# Allegro board CY8CKIT-050B_Board_Layout.brd
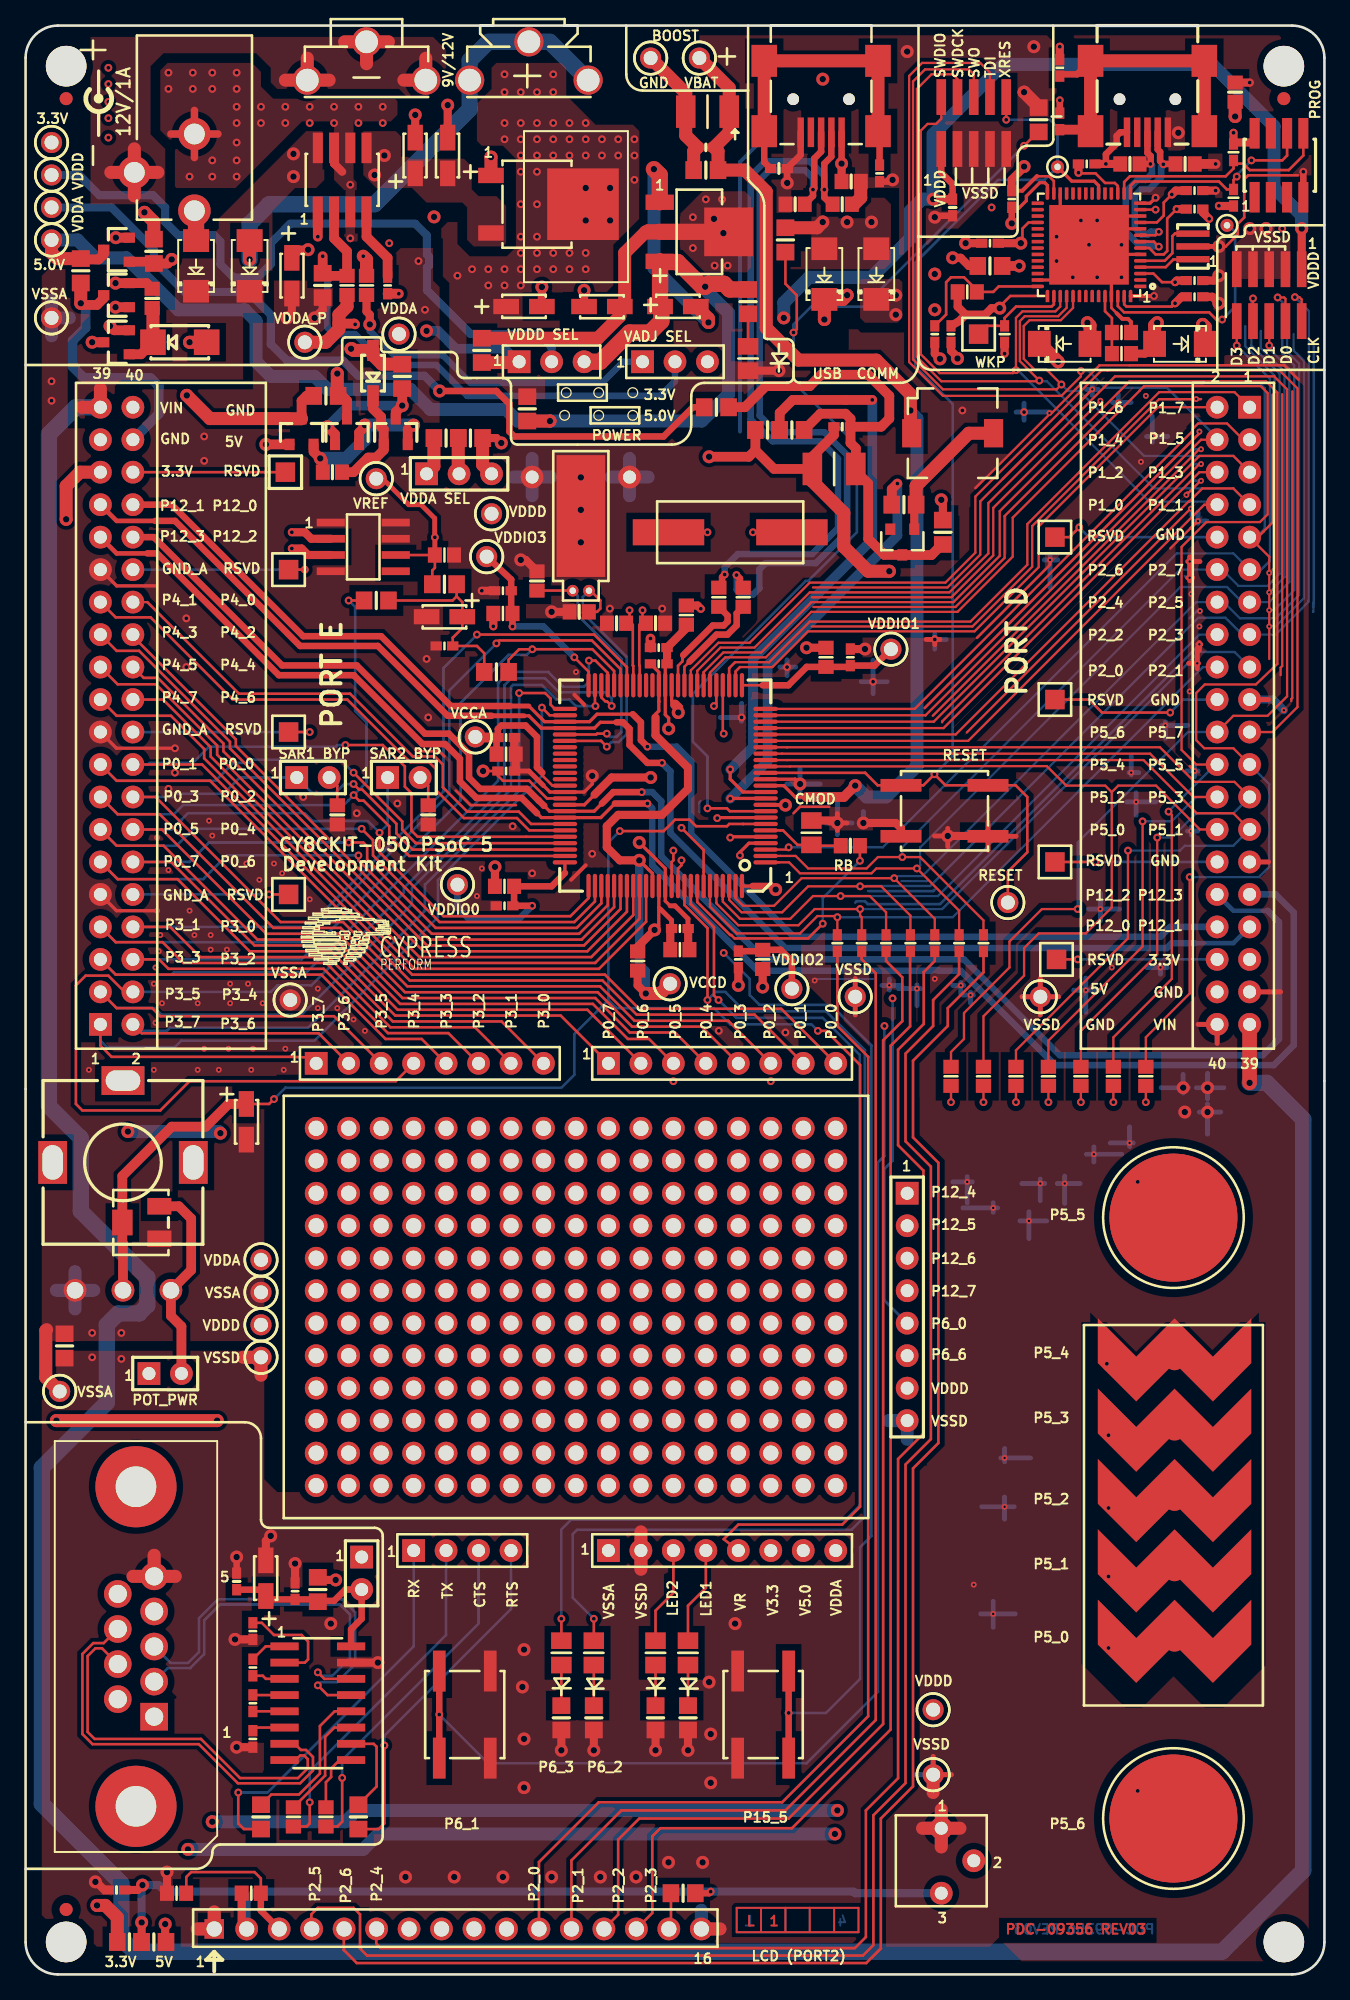
[diagram p0: board, top side]
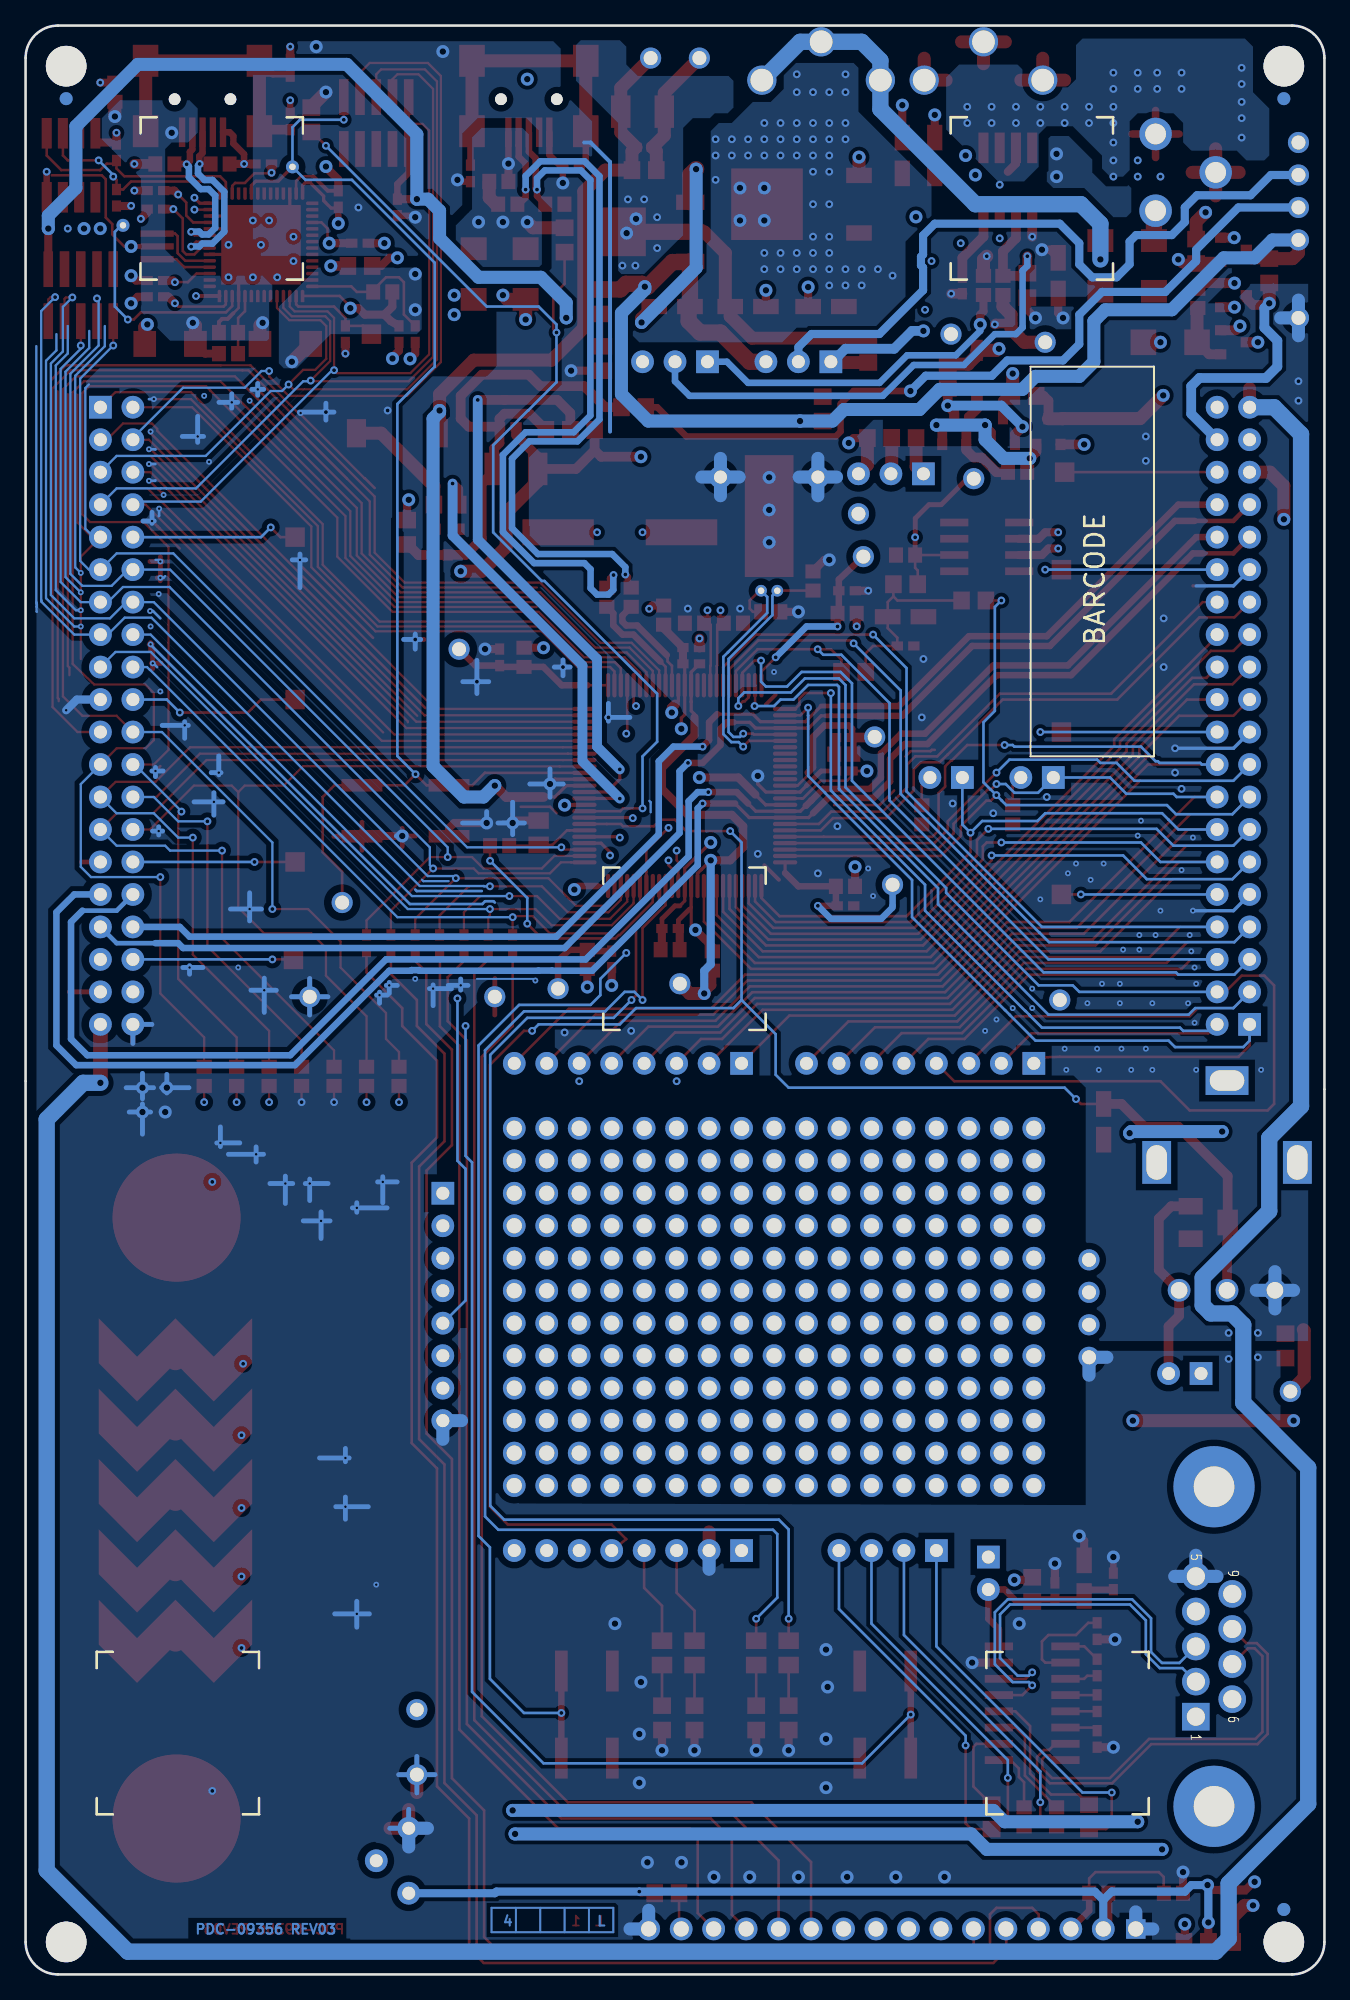
[diagram p1: board, bottom side, seen from below]

Outline 101.6 x 152.4 mm; copper layers: TOP, L02_PWR, L03_GND, BOTTOM. Coordinates in mm from the lower left corner of the outline.

## Design rules (mm)
net group CAPSENSE: nets N21185654 N21185709 N21185711 N21185727 N21185729 N21185731 N21185741 P1[2] P1[5] P1[6] P1[7] P2[0] P2[1] P2[2] P2[3] P2[4] P2[5] P2[6] P2[7] P5[0] P5[1] P5[2] P5[3] P5[4] P5[5] P5[6] P5[7] SWDCK SWDIO SWO TDI
net group DIFF-90: nets D+ D- DM DM_P DP DP_P
net group GND_SP: nets GND_EARTH
net group PWR_PH: nets N14773122 N16777347 N19970100 P12[0] P12[1] P12[2] P12[3] P12[4] P12[5] P12[6] P12[7] SEL3V3 V5.0 VBAT VBUS2 VCCD VDDA VDDD VIN VLCD
net group PWR_SP: nets N16777310 N16777432 V3.3
net group SPACE_15MILS: nets P0[0] P0[1] P0[2] P0[3] P0[4] P0[5] P0[6] P0[7] P3[0] P3[1] P3[2] P3[3] P3[4] P3[5] P3[6] P3[7] P4[0] P4[1] P4[2] P4[3] P4[4] P4[5] P4[6] P4[7]
net group SPACING_15MILS: nets N15034817 N15034825 N19309695 N19312684 N19313685 N19315692 N19318568 P6[6] P15[4]

## Placement (name value [footprint] x y rotation side)
BH1  BAT 9V MALE  [BATTHLDR_M9V]  26.67 151.13 180 top
BH2  BAT 9V FEMALE  [BATTHLDR_F9V]  39.37 151.13 180 top
C1  0.1 uFd  [C-CC0402]  72.52 138.18 270 top
C2  10 uFd 16v  [C-PCC3216]  51.03 130.43 0 top
C3  0.1 uFd  [C-CC0402]  53.21 142.88 180 top
C4  10 uFd 16v  [C-PCC3216]  30.48 142.24 90 top
C5  10 uFd 16v  [C-PCC3216]  33.02 142.24 90 top
C6  22 uFd  [C-CC1210]  53.34 145.67 180 top
C7  0.1 uFd  [C-CC0402]  77.14 138.84 270 top
C8  0.01 uFd  [C-CC0402]  80.9 149.1 90 top
C9  0.01 uFd  [C-CC0402]  66.8 140.84 270 top
C10  0.1 uFd  [C-CC0402]  91.44 139.5 0 top
C11  2.2 uFd  [C-CC0402]  91.44 138.05 0 top
C12  0.1 uFd  [C-CC0402]  75.44 135.38 180 top
C13  10 uFd 16v  [C-PCC3216]  20.83 132.84 270 top
C14  10 uFd 16v  [C-PCC3216]  38.99 130.43 0 top
C15  10 uFd 16v  [C-PCC3216]  45.08 130.43 180 top
C16  0.1 uFd  [C-CC0402]  91.44 132.46 0 top
C17  0.1 uFd  [C-CC0402]  28.32 132.08 270 top
C18  0.1 uFd  [C-CC0402]  91.44 131.19 0 top
C19  0.1 uFd  [C-CC0402]  71.12 128.27 270 top
C20  0.1 uFd  [C-CC0402]  72.39 128.27 270 top
C21  0.1 uFd  [C-CC0402]  83.01 141.58 0 top
C22  22 uFd  [C-CC1210]  63.25 117.73 180 top
C23  0.1 uFd  [C-CC0402]  63.88 121.03 180 top
C24  1.0 uFd  [C-CC0603]  32.77 111 0 top
C25  22 pFd  [C-CC0603]  40 108.97 90 top
C26  0.1 uFd  [C-CC0402]  37.34 108.2 180 top
C27  22 pFd  [C-CC0603]  43.31 106.55 180 top
C28  10 uFd 16v  [C-PCC3216]  32.77 106.17 180 top
C29  1.0 uFd  [C-CC0603]  51.69 106.3 270 top
C30  22 pFd  [C-CC0603]  46.23 105.66 180 top
C31  22 pFd  [C-CC0603]  49.28 105.66 0 top
C32  0.1 uFd  [C-CC0402]  32.77 103.89 180 top
C33  0.1 uFd  [C-CC0402]  49.53 103.76 0 top
C34  0.1 uFd  [C-CC0402]  64.52 103 90 top
C35  0.1 uFd  [C-CC0402]  49.53 102.49 0 top
C36  0.1 uFd  [C-CC0402]  37.59 96.72 0 top
C37  1.0 uFd  [C-CC0603]  37.59 95.43 0 top
C38  0.1 uFd  [C-CC0402]  37.59 94.11 0 top
C39  2200 pFd  [C-CC0805]  61.47 89.28 90 top
C40  0.1 uFd  [C-CC0402]  37.46 83.57 180 top
C41  0.1 uFd  [C-CC0402]  51.18 81.79 180 top
C42  1.0 uFd  [C-CC0603]  51.18 80.14 180 top
C43  0.1 uFd  [C-CC0402]  55.75 79.38 270 top
C44  1.0 uFd  [C-CC0603]  47.88 79.25 90 top
C45  10 uFd 16v  [C-PCC3216]  17.27 66.68 270 top
C46  10 uFd 16v  [C-PCC3216]  18.8 30.99 90 top
C47  0.1 uFd  [C-CC0402]  16.51 30.73 90 top
C48  0.1 uFd  [C-CC0402]  21.08 29.97 90 top
C49  0.1 uFd  [C-CC0402]  17.78 26.85 270 top
C50  0.1 uFd  [C-CC0402]  17.78 24 270 top
C51  0.1 uFd  [C-CC0402]  17.78 21.21 270 top
C52  0.1 uFd  [C-CC0402]  17.78 18.41 270 top
C53  0.1 uFd  [C-CC0402]  7.11 6.6 180 top
C54  1.0 uFd  [C-CC0603]  24.38 90.68 270 top
C55  1.0 uFd  [C-CC0603]  31.5 90.68 270 top
CSB1  CapSense  [CSB-10MM]  89.79 59.18 0 top
CSB2  CapSense  [CSB-10MM]  89.79 12.19 0 top
CSS1  CapSense Linear Slider 5 Seg  [CSS5A]  89.79 25.78 270 top
D1  SS12-E3/61T  [DO-214AC]  62.48 131.19 90 top
D2  SS12-E3/61T  [DO-214AC]  92.08 127.51 180 top
D3  SS12-E3/61T  [DO-214AC]  13.34 131.83 90 top
D4  SS12-E3/61T  [DO-214AC]  17.53 131.83 90 top
D5  LED Green  [CR-LED0805]  56.52 126.37 90 top
D6  ZHCS  [BAT400D_SOT23]  68.58 112.01 180 top
D7  SS12-E3/61T  [DO-214AC]  66.55 131.19 90 top
D8  SS12-E3/61T  [DO-214AC]  79.5 127.51 0 top
D9  CG0603MLC  [C-CC0603]  94.61 147.19 90 top
D10  CG0603MLC  [C-CC0603]  90.7 141.58 0 top
D11  CG0603MLC  [C-CC0603]  86.39 141.58 180 top
D12  CG0603MLC  [C-CC0603]  63.88 138.43 0 top
D13  CG0603MLC  [C-CC0603]  60.2 138.43 180 top
D14  CG0603MLC  [C-CC0603]  64.58 140.21 0 top
D15  Vz=4.3V(PTZTE254,SOD-106)  [SOD-106-R]  12.07 127.63 0 top
D16  Vz=1.8V(BZT52C2V0-7-F)  [SOD-123-R]  27.18 125.22 90 top
J1  USB MINI B  [J-ACON-MINIABSMT]  87.76 151.89 0 top
J2  USB MINI B  [J-ACON-MINIABSMT]  62.23 151.89 0 top
J3  50MIL KEYED SMD  [FTSH-105-XX-X-DV-K]  74.17 144.78 0 top
J4  POWER JACK P-5  [JK-PJ-102A]  13.21 137.92 90 top
J5  1 PIN HDR  [HDR1]  2.03 140.72 0 top
J6  1 PIN HDR  [HDR1]  2.03 138.18 0 top
J7  1 PIN HDR  [HDR1]  2.03 129.54 0 top
J8  1 PIN HDR  [HDR1]  29.21 128.27 180 top
J9  RED_NO LOAD  [SMD_HEADER]  74.55 128.27 0 top
J10  3p_jumper  [HDR3X1]  38.61 126.11 270 top
J11  3p_jumper  [HDR3X1]  48.26 126.11 270 top
J12  1 PIN HDR  [HDR1]  36.45 114.22 180 top
J13  RED_NO LOAD  [SMD_HEADER]  20.32 117.47 90 top
J14  1 PIN HDR  [HDR1]  70.99 20.7 0 top
J15  RED_NO LOAD  [SMD_HEADER]  80.52 112.4 0 top
J16  1 PIN HDR  [HDR1]  36.07 110.87 180 top
J17  RED_NO LOAD  [SMD_HEADER]  20.57 109.85 0 top
J18  1 PIN HDR  [HDR1]  67.69 103.63 180 top
J19  RED_NO LOAD  [SMD_HEADER]  80.52 99.69 0 top
J20  RED_NO LOAD  [SMD_HEADER]  20.57 97.16 0 top
J21  RED_NO LOAD  [SMD_HEADER]  80.52 87 0 top
J22  1 PIN HDR  [HDR1]  33.78 85.22 270 top
J23  RED_NO LOAD  [SMD_HEADER]  20.57 84.46 0 top
J24  RED_NO LOAD  [SMD_HEADER]  80.64 79.38 90 top
J25  1 PIN HDR  [HDR1]  59.94 77.09 180 top
J26  1 PIN HDR  [HDR1]  64.9 76.45 180 top
J27  1 PIN HDR  [HDR1]  20.7 76.2 0 top
J28  1 PIN HDR  [HDR1]  79.38 76.45 0 top
J29  1 PIN HDR  [HDR1]  18.41 50.8 0 top
J30  2 PIN HDR  [HDR2]  9.65 46.99 270 top
J31  1 PIN HDR  [HDR1]  18.41 55.88 0 top
J32  1 PIN HDR  [HDR1]  18.41 53.34 0 top
J33  1 PIN HDR  [HDR1]  21.84 127.63 90 top
J34  1 PIN HDR  [HDR1]  18.41 48.26 0 top
J35  1 PIN HDR  [HDR1]  2.67 45.59 0 top
J36  1 PIN HDR  [HDR1]  70.99 15.62 0 top
J37  2 PIN HDR  [HDR2]  26.29 32.64 180 top
J38  3p_jumper  [HDR3X1]  31.37 117.35 270 top
J39  1 PIN HDR  [HDR1]  27.43 116.97 0 top
J40  50MIL KEYED SMD  [FTSH-105-XX-X-DV-K]  97.28 131.32 180 top
J41  1 PIN HDR  [HDR1]  50.42 77.47 0 top
J42  1 PIN HDR  [HDR1]  35.18 96.77 0 top
J43  2 PIN HDR  [HDR2]  21.21 93.6 270 top
J44  2 PIN HDR  [HDR2]  28.32 93.6 270 top
L1  22 uH  [L-IND-SLF7032]  72.52 120.52 90 top
LED1  LED Red  [CR-LED0805]  51.82 25.15 90 top
LED2  LED Red  [CR-LED0805]  49.28 25.15 90 top
LED3  LED Red  [CR-LED0805]  44.45 25.15 90 top
LED4  LED Red  [CR-LED0805]  41.91 25.15 90 top
NOREF  -  [unnamed]  3.17 2.54 0 top
NOREF#2  -  [#2]  0 25.4 0 top
NOREF#3  -  [#2]  89.53 18.67 90 top
NOREF#4  -  [#2]  0 0 0 top
NOREF#5  -  [#2]  22.73 138.68 90 top
NOREF#6  -  [#2]  49.91 80.01 90 top
NOREF#7  -  [#2]  98.42 3.17 0 top
NOREF#8  -  [#2]  0.59 151.49 0 top
NOREF#9  -  [unnamed#2]  98.42 146.69 0 top
NOREF#10  -  [#2]  97.79 7.62 0 top
NOREF#11  -  [unnamed]  3.17 149.22 0 top
NOREF#12  -  [unnamed]  98.42 2.54 0 top
NOREF#13  -  [#2]  98.42 3.17 0 top
NOREF#14  -  [unnamed#3]  54.74 22.73 0 top
NOREF#15  -  [unnamed]  98.42 149.22 0 top
NOREF#16  -  [#2]  0 0 0 top
NOREF#17  -  [#2]  32.64 18.67 90 top
NOREF#18  -  [unnamed#2]  3.17 146.69 0 top
NOREF#19  -  [#2]  86.11 138.68 90 top
NOREF#20  -  [#2]  3.17 3.17 0 top
NOREF#21  -  [#2]  97.03 0 90 top
NOREF#22  -  [#2]  25.4 78.1 0 top
NOREF#23  -  [#2]  0 148.72 0 top
NOREF#24  -  [#2]  -161.95 -211.58 0 top
NOREF#25  -  [unnamed#2]  3.17 5.08 0 top
NOREF#26  -  [#2]  3.17 3.17 0 top
NOREF#27  -  [unnamed#2]  3.17 5.08 180 bottom
NOREF#28  -  [unnamed#2]  3.17 146.69 180 bottom
NOREF#29  -  [unnamed#2]  98.42 146.69 180 bottom
P1  20x2 RECP RA  [HDR20X2]  5.85 74.29 270 top
P2  20x2 RECP RA  [HDR20X2]  95.75 122.56 90 top
P3  RECP 8X1  [RECP8X1-VERT]  22.73 71.25 90 top
P4  RECP 8X1  [RECP8X1-VERT]  45.59 71.25 90 top
P5  4x1 RECP  [RECP4X1]  30.35 33.15 270 top
P6  RECP 8X1  [RECP8X1-VERT]  45.59 33.15 90 top
P7  DB9 FEMALE  [P-DB9F_VERTICAL]  10.06 20.15 90 top
P8  LCD HEADER W/O BACKLIGHT  [J-LCM-S01602DSR]  46.76 -11.94 0 top
P9  RECP 8X1  [RECP8X1-VERT]  68.96 61.09 0 top
Q1  PMOS( DMP3098L-7)  [SOT23-3098L]  7.11 131.32 90 top
Q2  PMOS( DMP3098L-7)  [SOT23-3098L]  7.11 127.63 90 top
Q3  PMOS( DMP3098L-7)  [SOT23-3098L]  7.11 134.87 90 top
Q4  PMOS( DMP3098L-7)  [SOT23-3098L]  21.59 120.65 0 top
Q5  PMOS( DMP3098L-7)  [SOT23-3098L]  25.15 120.65 0 top
Q6  PMOS( DMP3098L-7)  [SOT23-3098L]  28.96 120.65 0 top
R1  R  [R-CR0805]  53.21 141.1 180 top
R2  3K  [R-CR0805]  79.25 145.03 90 top
R3  100K  [R-CR0402]  80.9 144.91 90 top
R4  100K  [R-CR0402]  58.93 141.22 0 top
R5  2.2K  [R-CR0402]  94.49 142.49 270 top
R6  2.2K  [R-CR0402]  94.49 138.94 90 top
R7  220 ohm  [R-CR0603]  9.91 131.06 270 top
R8  1.5K  [R-CR0805]  59.44 135.64 270 top
R9  ZERO  [R-CR0805]  75.44 133.6 0 top
R10  1K ohm  [0805]  10.03 134.75 90 top
R11  1K  [R-CR0805]  23.24 132.08 270 top
R12  3.16K  [R-CR0603]  25.15 132.08 90 top
R13  3.74K  [R-CR0603]  26.67 132.08 270 top
R14  100K  [R-CR0603]  73.66 131.57 0 top
R15  330 ohm  [R-CR0805]  56.52 130.81 270 top
R16  442 ohm  [R-CR0603]  24 117.47 0 top
R17  10K  [R-CR0402]  76.58 128.27 90 top
R18  1K ohm  [0805]  29.46 124.97 90 top
R21  39K  [R-CR0603]  85.72 126.75 0 top
R22  62K  [R-CR0603]  85.72 128.4 180 top
R23  ZERO  [R-CR0805]  32.89 120.14 0 top
R24  ZERO  [R-CR0805]  39.24 122.43 90 top
R25  R  [R-CR0805]  54.04 122.56 0 top
R26  ZERO  [R-CR0805]  35.69 127 270 top
R27  ZERO  [R-CR0805]  59.94 120.78 180 top
R28  R  [R-CR0805]  58.04 120.78 0 top
R29  R  [R-CR0805]  68.71 114.94 180 top
R30  ZERO  [R-CR0805]  34.8 120.14 180 top
R31  R  [R-CR0805]  71.75 112.78 270 top
R32  22E  [R-CR0603]  54.23 107.7 270 top
R33  22E  [R-CR0603]  56.13 107.7 270 top
R34  ZERO  [R-CR0805]  32.77 108.71 0 top
R35  ZERO  [R-CR0603]  37.34 106.43 180 top
R36  ZERO  [R-CR0603]  62.61 103 90 top
R37  ZERO  [R-CR0805]  36.83 101.85 0 top
R38  2.2K  [R-CR0603]  64.52 88.26 180 top
R39  ZERO  [R-CR0603]  37.46 85.09 180 top
R40  10K  [R-CR0402]  63.5 80.65 270 top
R41  10K  [R-CR0402]  65.41 80.65 270 top
R42  10K  [R-CR0402]  67.31 80.65 270 top
R43  10K  [R-CR0402]  69.22 80.65 270 top
R44  10K  [R-CR0402]  71.12 80.65 270 top
R45  10K  [R-CR0402]  73.02 80.65 270 top
R46  10K  [R-CR0402]  74.93 80.65 270 top
R47  ZERO  [R-CR0603]  57.66 79.38 270 top
R48  ZERO  [R-CR0603]  72.39 70.23 270 top
R49  ZERO  [R-CR0603]  74.93 70.23 270 top
R50  ZERO  [R-CR0603]  77.47 70.23 270 top
R51  ZERO  [R-CR0603]  80.01 70.23 270 top
R52  ZERO  [R-CR0603]  82.55 70.23 270 top
R53  ZERO  [R-CR0603]  85.09 70.23 270 top
R54  ZERO  [R-CR0603]  87.63 70.23 270 top
R55  10K  [R-POT-3214W]  9.02 58.8 180 top
R56  10K  [POT_10K_296U_VER]  7.62 63.5 0 top
R57  ZERO  [R-CR0805]  3.05 49.15 270 top
R58  10 ohm  [R-CR0805]  22.86 30.1 270 top
R59  330 ohm  [R-CR0805]  41.91 20.07 270 top
R60  330 ohm  [R-CR0805]  44.45 20.07 270 top
R61  330 ohm  [R-CR0805]  49.28 20.07 270 top
R62  330 ohm  [R-CR0805]  51.82 20.07 270 top
R63  100 ohm  [R-CR0805]  18.41 12.32 270 top
R64  ZERO  [R-CR0603]  20.96 12.32 270 top
R65  100 ohm  [R-CR0805]  26.04 12.32 270 top
R66  ZERO  [R-CR0603]  23.5 12.32 270 top
R67  10K  [EVN-D8AA03B14]  71.63 11.43 270 top
R68  100 ohm  [R-CR0603]  11.81 6.35 180 top
R69  10K  [R-CR0603]  17.65 6.35 0 top
R70  R  [R-CR0805]  51.43 6.35 0 top
R71  0E  [R-CR0805]  8.13 2.54 0 top
R72  0E  [R-CR0805]  10.03 2.54 0 top
R73  ZERO  [R-CR0805]  27.43 107.44 180 top
R74  ZERO  [R-CR0805]  4.32 133.22 90 top
R75  ZERO  [R-CR0805]  23.5 123.44 0 top
SW1  SW PUSHBUTTON  [S-EVQ-PHP03]  71.88 91 270 top
SW2  SW PUSHBUTTON  [S-EVQ-PHP03]  34.35 20.32 0 top
SW3  SW PUSHBUTTON  [S-EVQ-PHP03]  57.7 20.32 180 top
TP1  BLACK  [TP-43R_S]  48.89 149.86 0 top
TP2  RED  [TP-43R_S]  52.7 149.86 0 top
TP3  RED  [TP-43R_S]  2.03 143.26 0 top
TP4  RED  [TP-43R_S]  2.03 135.64 0 top
TP5  RED  [TP-43R_S]  76.83 83.82 0 top
TV1  -  [TV-20R]  80.72 141.35 0 top
TV2  -  [TV-20R]  93.98 136.78 0 top
U1  LT1763CS8  [SO8]  24.77 140.33 90 top
U2  AP1117D50G  [TO252]  40 138.43 270 top
U3  24LC00/SN 8-SOIC  [SO8]  98.04 141.48 90 top
U4  LM1117MPX-3.3  [SOT223]  52.7 136.27 270 top
U5  CY7C68013A-56LTXC  [QFN56]  83.19 135.25 180 top
U6  -  [LM4140]  23.88 113.54 270 top
U7  CY8C5568AXI-060 TQFP100  [TQFP-100]  50.04 92.96 180 top
U8  MAX3232CDR  [SOIC-16]  22.86 21.21 0 top
Y1  24 MHz  [Y-CSTCW_X]  91.31 135.13 90 top
Y2  32.768KHz XTAL  [Y-XTAL-CFS308]  42.8 108.2 90 top
Y3  24 MHz Crystal  [CSM-7X]  55.12 112.78 0 top

## Library data of the parts
BH1 = Battery Holder 9V male PC Mnt_1
BH2 = TMP_175521
C1 C3 C7 C10 C12 C16-C21 C23 C26 C32-C36 C38 C40 C41 C43 C47-C53 = 0.1 uFd 0402: alternate symbols: (C-CC0402_A)
C2 C4 C5 C13-C15 C28 C45 C46 = 10 uFd Tantalum 16v 3216_2
C6 C22 = 22 uFd 1210 X5R 10V
C8 C9 = 0.01 uFd 0402 X7R
C11 = 2.2 uFd 0402 X5R 6.3V: alternate symbols: (C-CC0402_A)
C24 C29 C37 C42 C44 C54 C55 = 1.0 uFd 0603 X5R 25V 10%: alternate symbols: (C-CC0603_A); tolerance: 10%
C25 C27 = 560 pFd 0603
C30 C31 = 22 pFd 0402: alternate symbols: (C-CC0402_A)
C39 = 0.047 uFd 0805 X7R
CSB1 CSB2 = CapSense Button Circle Solid
CSS1 = CapSense Linear Slider 5 Seg
D1-D4 D7-D14 = DIODE SCHOTTKY SS12
D5 LED1-LED4 = LED Green 0805
D6 = SCHOTT 40V 1A SOT23
D15 D16 = DIODE BREAKDOWN
J1 J2 = USB MINI AB Right Angle
J3 J40 = 10 Pin Header 50mil Keyed SMD
J4 = JCK PWR BARRELL P5
J5-J7 J14 J27 J28 J35 J36 = 1 PIN Header: room: 2
J8 J12 J16 J18 J22 J25 J26 J29 J31-J34 J39 J41 J42 = 1 PIN Header: room: 5
J9 J13 J15 J17 J19-J21 J23 J24 = Test Point 43 hole - RED_1
J10 J11 J38 = 3p_jumper
J30 J37 J43 J44 = 2 PIN Header
L1 = 22 uH Inductor 7032 SMD_0
P1 P2 = RCP 20x2 _0.100 GOLD TH
P3 P4 P6 P9 = 8x1 RECPT VERT
P5 = RCP 4x1 _0.100 GOLD TH
P7 = DB9 Female Right Angle
P8 = RCP LCD 16x1 .100 TH
Q1 Q4 = P DGS_1
Q2 Q3 Q5 Q6 = P DGS_2
R1 R25 R28 R29 R31 R70 = NO LOAD Resistor 0805_0
R2 R7 R8 R10 R16 R18 = RESISTOR
R3 R4 = 100K ohm 5% 0402: alternate symbols: (R-CR0402_A)
R5 R6 = 2.2K ohm 5% 0402: alternate symbols: (R-CR0402_A)
R9 R23 R24 R26 R27 R30 R34 R37 R57 R73-R75 = Zero ohm 0805
R11 = 1K ohm 5% 0805
R12 = 560 ohm 5% 0603: alternate symbols: (R-CR0603_A)
R13 = 2.4K ohm 5% 0603: alternate symbols: (R-CR0603_A)
R14 = 100K ohm 1% 0603: alternate symbols: (R-CR0603_A); tolerance: 1%
R15 R59-R62 R71 R72 = 330 ohm 5% 0805
R17 R40-R46 = 10K ohm 5% 0402: alternate symbols: (R-CR0402_A)
R21 = 39K ohm 1% 0603: alternate symbols: (R-CR0603_A); tolerance: 1%
R22 = 62K ohm 1% 0603: alternate symbols: (R-CR0603_A); tolerance: 1%
R32 R33 = 24 ohm 5% 0603
R35 R36 R39 R47 R64 R66 = Zero ohm 0603_11: alternate symbols: (R-CR0603_A)
R38 = 4_0.99K ohm 1% 0603: alternate symbols: (R-CR0603_A); tolerance: 1%
R48-R54 = Zero ohm 0603_1: alternate symbols: (R-CR0603_A)
R55 R67 = Pot 10K single turn 3352T
R56 = POT 10K 296UD103B1N_0
R58 = R_0
R63 R65 = 100 ohm 5% 0805 1/8W
R68 = 100 ohm 5% 0603: alternate symbols: (R-CR0603_A)
R69 = 10K ohm 5% 0603: alternate symbols: (R-CR0603_A)
SW1-SW3 = Switch Pushbutton
TP1 = Test Point 43 hole - BLACK_0
TP2-TP5 = Test Point 43 hole - RED_0
TV1 TV2 = Test Via 20 hole 40 plated
U1 = LT1763CS8
U2 = REG IC 5V 1A TO-252
U3 = 24LC00 SOT-23_0
U4 = LM1117MPX-3.3 SOT223
U5 = CY7C68013A-56LFXC QFN56_2
U6 = LT1763CS8_0
U7 = CY8C3866AXI-040_TQFP100_0
U8 = TMP_134555
Y1 = 24 MHz Resonator CSTCW
Y2 = 32.768KHz XTAL_5P
Y3 = XTAL HC49 SMD NO LOAD_3

## Footprints (pads in the part's own frame, mm; a bottom-side part is the same pattern mirrored in y, then rotated)
0805
  rect 1.295x1.397 smd: 1(-0.953,0) 2(0.953,0)
BAT400D_SOT23
  rect 0.787x0.889 smd: (0.94,-1.003) 1(0,1.003) 2(-0.94,-1.003)
BATTHLDR_F9V
  round 2.286 hole 1.778: 1(0,0) 2(-4.636,2.997) 3(4.636,2.997)
BATTHLDR_M9V
  round 2.286 hole 1.778: 1(0,0) 2(-4.636,2.997) 3(4.636,2.997)
C-CC0402
  rect 0.889x0.711 smd: 1(-0.648,0) 2(0.648,0)
C-CC0603
  rect 1.092x1.194 smd: 1(-0.749,0) 2(0.749,0)
C-CC0805
  rect 1.295x1.6 smd: 1(-0.953,0) 2(0.953,0)
C-CC1210
  rect 1.524x2.54 smd: 1(-1.702,0) 2(1.702,0)
C-PCC3216
  rect 2.007x1.194 smd: 1(-1.397,0) 2(1.397,0)
CR-LED0805
  rect 1.295x1.6 smd: 1(-0.953,0) 2(0.953,0)
CSB-10MM
  custom 10x2.5 smd: 1(0,0)
CSM-7X
  rect 5.588x2.032 smd: 1(-4.826,0) 2(4.826,0)
CSS5A
  custom 6.51x12 smd: 1(-0.274,0.087) 2(-5.78,0.087) 3(-11.28,0.087) 4(-16.78,0.087) 5(-22.28,0.087)
DO-214AC
  rect 1.778x2.032 smd: 1(-0.203,0) 2(3.759,0)
EVN-D8AA03B14
  round 1.778 hole 1.016: 1(0,0) 2(2.54,2.54) 3(5.08,0)
FTSH-105-XX-X-DV-K
  rect 0.75x2.8 smd: 1(-2.54,-2.03) 2(-2.54,2.03) 3(-1.27,-2.03) 4(-1.27,2.03) 5(0,-2.03) 6(0,2.03) 7(1.27,-2.03) 8(1.27,2.03) 9(2.54,-2.03) 10(2.54,2.03)
HDR1
  round 1.651 hole 1.092: 1(0,0)
HDR2
  rect 1.778x1.778 hole 1.016: 1(0,0)
  round 1.778 hole 1.016: 2(0,2.54)
HDR3X1
  rect 1.778x1.778 hole 1.016: 1(0,0)
  round 1.778 hole 1.016: 2(0,2.54) 3(0,5.08)
HDR20X2
  rect 1.778x1.778 hole 1.016: 1(0,0)
  round 1.778 hole 1.016: 2(0,2.54) 3(-2.54,0) 4(-2.54,2.54) 5(-5.08,0) 6(-5.08,2.54) 7(-7.62,0) 8(-7.62,2.54) 9(-10.16,0) 10(-10.16,2.54) 11(-12.7,0) 12(-12.7,2.54) 13(-15.24,0) 14(-15.24,2.54) 15(-17.78,0) 16(-17.78,2.54) 17(-20.32,0) 18(-20.32,2.54) 19(-22.86,0) 20(-22.86,2.54) 21(-25.4,0) 22(-25.4,2.54) 23(-27.94,0) 24(-27.94,2.54) 25(-30.48,0) 26(-30.48,2.54) 27(-33.02,0) 28(-33.02,2.54) 29(-35.56,0) 30(-35.56,2.54) 31(-38.1,0) 32(-38.1,2.54) 33(-40.64,0) 34(-40.64,2.54) 35(-43.18,0) 36(-43.18,2.54) 37(-45.72,0) 38(-45.72,2.54) 39(-48.26,0) 40(-48.26,2.54)
J-ACON-MINIABSMT
  round 0.914 hole 0.914 unplated: (-2.184,-5.25) (2.184,-5.25)
  rect 0.5x2.311 smd: 1(1.6,-7.836) 2(0.8,-7.836) 3(0,-7.836) 4(-0.8,-7.836) 5(-1.6,-7.836)
  rect 1.999x2.499 smd: 6(4.45,-2.25) 7(4.45,-7.749) 8(-4.45,-2.25) 9(-4.45,-7.749)
J-LCM-S01602DSR
  rect 1.524x1.524 hole 1.194: 1(-32.004,15.494)
  round 1.778 hole 1.194: 2(-29.464,15.494) 3(-26.924,15.494) 4(-24.384,15.494) 5(-21.844,15.494) 6(-19.304,15.494) 7(-16.764,15.494) 8(-14.224,15.494) 9(-11.684,15.494) 10(-9.144,15.494) 11(-6.604,15.494) 12(-4.064,15.494) 13(-1.524,15.494) 14(1.016,15.494) 15(3.556,15.494) 16(6.096,15.494)
JK-PJ-102A
  round 2.54 hole 1.626: 1(0,0) 2(6,0) 3(3,4.7)
L-IND-SLF7032
  rect 2.21x1.499 smd: 1(0,3.2) 2(0,-3.2)
LM4140
  rect 0.6x2.2 smd: 1(0,0) 2(1.27,0) 3(2.54,0) 4(3.81,0) 5(3.81,5.08) 6(2.54,5.08) 7(1.27,5.08) 8(0,5.08)
P-DB9F_VERTICAL
  rect 2.159x2.159 hole 1.422: 1(0,0)
  round 2.159 hole 1.422: 2(2.743,0) 3(5.486,0) 4(8.23,0) 5(10.973,0) 6(1.372,2.845) 7(4.115,2.845) 8(6.858,2.845) 9(9.601,2.845)
  round 6.35 hole 3.175: 10(-7.01,1.422) 11(17.983,1.422)
POT_10K_296U_VER
  rect 2.25x3.35 hole 1.6x2.7: (-5.5,0) (5.5,0)
  rect 3.35x2.25 hole 2.7x1.6: (0,6.4)
  round 1.778 hole 1.295: 1(-3.75,-10) 2(0,-10) 3(3.75,-10)
QFN56
  custom 0.965x0.279 smd: 1(-4,3.25) 2(-4,2.75) 3(-4,2.25) 4(-4,1.75) 5(-4,1.249) 6(-4,0.749) 7(-4,0.249) 8(-4,-0.251) 9(-4,-0.751) 10(-4,-1.251) 11(-4,-1.751) 12(-4,-2.252) 13(-4,-2.752) 14(-4,-3.252) 29(4,-3.25) 30(4,-2.75) 31(4,-2.25) 32(4,-1.75) 33(4,-1.249) 34(4,-0.749) 35(4,-0.249) 36(4,0.251) 37(4,0.751) 38(4,1.251) 39(4,1.751) 40(4,2.252) 41(4,2.752) 42(4,3.252)
  custom 0.279x0.965 smd: 15(-3.25,-4) 16(-2.75,-4) 17(-2.25,-4) 18(-1.75,-4) 19(-1.249,-4) 20(-0.749,-4) 21(-0.249,-4) 22(0.251,-4) 23(0.751,-4) 24(1.251,-4) 25(1.751,-4) 26(2.252,-4) 27(2.752,-4) 28(3.252,-4) 43(3.25,4) 44(2.75,4) 45(2.25,4) 46(1.75,4) 47(1.249,4) 48(0.749,4) 49(0.249,4) 50(-0.251,4) 51(-0.751,4) 52(-1.251,4) 53(-1.751,4) 54(-2.252,4) 55(-2.752,4) 56(-3.252,4)
  rect 6.223x6.223 smd: 57(0,0)
R-CR0402
  rect 0.889x0.711 smd: 1(-0.648,0) 2(0.648,0)
R-CR0603
  rect 1.092x1.194 smd: 1(-0.749,0) 2(0.749,0)
R-CR0805
  rect 1.295x1.397 smd: 1(-0.953,0) 2(0.953,0)
R-POT-3214W
  rect 1.88x1.295 smd: 1(-1.448,1.27) 3(-1.448,-1.27)
  rect 1.6x2.007 smd: 2(1.448,0)
RECP4X1
  rect 1.778x1.778 hole 1.016: 1(0,0)
  round 1.778 hole 1.016: 2(0,2.54) 3(0,5.08) 4(0,7.62)
RECP8X1-VERT
  rect 1.778x1.778 hole 1.016: 1(0,0)
  round 1.778 hole 1.016: 2(0,-2.54) 3(0,-5.08) 4(0,-7.62) 5(0,-10.16) 6(0,-12.7) 7(0,-15.24) 8(0,-17.78)
S-EVQ-PHP03
  rect 0.991x3.2 smd: 1A(-1.994,3.404) 1B(-1.994,-3.404) 2A(1.994,3.404) 2B(1.994,-3.404)
SMD_HEADER
  rect 1.524x1.524 smd: 1(0,0)
SO8
  rect 2.388x0.787 smd: 1(-2.502,1.905) 2(-2.502,0.635) 3(-2.502,-0.635) 4(-2.502,-1.905) 5(2.502,-1.905) 6(2.502,-0.635) 7(2.502,0.635) 8(2.502,1.905)
SOD-106-R
  rect 2x2 smd: 1(2.1,0) 2(-2.1,0)
SOD-123-R
  rect 1.651x0.914 smd: 1(1.778,0) 2(-1.778,0)
SOIC-16
  rect 2.21x0.61 smd: 1(-2.603,4.445) 2(-2.603,3.175) 3(-2.603,1.905) 4(-2.603,0.635) 5(-2.603,-0.635) 6(-2.603,-1.905) 7(-2.603,-3.175) 8(-2.603,-4.445) 9(2.603,-4.445) 10(2.603,-3.175) 11(2.603,-1.905) 12(2.603,-0.635) 13(2.603,0.635) 14(2.603,1.905) 15(2.603,3.175) 16(2.603,4.445)
SOT23-3098L
  rect 0.787x0.889 smd: 1(0,1.003) 2(-0.94,-1.003) 3(0.94,-1.003)
SOT223
  rect 1.194x2.21 smd: 1(-2.311,-3.099) 2(0,-3.099) 3(2.311,-3.099)
  rect 3.81x3.81 smd: 4(0,2.286)
TO252
  rect 1.2x2 smd: 1(-2.25,-3.6) 3(2.25,-3.6)
  rect 5.6x5.6 smd: 2(0,3.6)
TP-43R_S
  round 1.651 hole 1.092: 1(0,0)
TQFP-100
  oval 1.905x0.33 smd: 1(-7.85,6) 2(-7.85,5.5) 3(-7.85,5) 4(-7.85,4.5) 5(-7.85,4) 6(-7.85,3.5) 7(-7.85,3) 8(-7.85,2.5) 9(-7.85,2) 10(-7.85,1.5) 11(-7.85,1) 12(-7.85,0.5) 13(-7.85,0) 14(-7.85,-0.5) 15(-7.85,-1) 16(-7.85,-1.5) 17(-7.85,-2) 18(-7.85,-2.5) 19(-7.85,-3) 20(-7.85,-3.5) 21(-7.85,-4) 22(-7.85,-4.5) 23(-7.85,-5) 24(-7.85,-5.5) 25(-7.85,-6) 51(7.85,-6) 52(7.85,-5.5) 53(7.85,-5) 54(7.85,-4.5) 55(7.85,-4) 56(7.85,-3.5) 57(7.85,-3) 58(7.85,-2.5) 59(7.85,-2) 60(7.85,-1.5) 61(7.85,-1) 62(7.85,-0.5) 63(7.85,0) 64(7.85,0.5) 65(7.85,1) 66(7.85,1.5) 67(7.85,2) 68(7.85,2.5) 69(7.85,3) 70(7.85,3.5) 71(7.85,4) 72(7.85,4.5) 73(7.85,5) 74(7.85,5.5) 75(7.85,6)
  oval 0.33x1.905 smd: 26(-6,-7.85) 27(-5.5,-7.85) 28(-5,-7.85) 29(-4.5,-7.85) 30(-4,-7.85) 31(-3.5,-7.85) 32(-3,-7.85) 33(-2.5,-7.85) 34(-2,-7.85) 35(-1.5,-7.85) 36(-1,-7.85) 37(-0.5,-7.85) 38(0,-7.85) 39(0.5,-7.85) 40(1,-7.85) 41(1.5,-7.85) 42(2,-7.85) 43(2.5,-7.85) 44(3,-7.85) 45(3.5,-7.85) 46(4,-7.85) 47(4.5,-7.85) 48(5,-7.85) 49(5.5,-7.85) 50(6,-7.85) 76(6,7.85) 77(5.5,7.85) 78(5,7.85) 79(4.5,7.85) 80(4,7.85) 81(3.5,7.85) 82(3,7.85) 83(2.5,7.85) 84(2,7.85) 85(1.5,7.85) 86(1,7.85) 87(0.5,7.85) 88(0,7.85) 89(-0.5,7.85) 90(-1,7.85) 91(-1.5,7.85) 92(-2,7.85) 93(-2.5,7.85) 94(-3,7.85) 95(-3.5,7.85) 96(-4,7.85) 97(-4.5,7.85) 98(-5,7.85) 99(-5.5,7.85) 100(-6,7.85)
TV-20R
  round 1.016 hole 0.508: 1(0,0)
unnamed
  round 3.175 hole 3.175 unplated: (0,0)
unnamed#2
  round 1.016 smd: (0,0)
unnamed#3
  round 1.778 hole 1.194: (-32.004,43.434) (-32.004,40.894) (-32.004,38.354) (-32.004,35.814) (-32.004,33.274) (-32.004,30.734) (-32.004,28.194) (-32.004,25.654) (-32.004,23.114) (-32.004,20.574) (-32.004,18.034) (-32.004,15.494) (-29.464,43.434) (-29.464,40.894) (-29.464,38.354) (-29.464,35.814) (-29.464,33.274) (-29.464,30.734) (-29.464,28.194) (-29.464,25.654) (-29.464,23.114) (-29.464,20.574) (-29.464,18.034) (-29.464,15.494) (-26.924,43.434) (-26.924,40.894) (-26.924,38.354) (-26.924,35.814) (-26.924,33.274) (-26.924,30.734) (-26.924,28.194) (-26.924,25.654) (-26.924,23.114) (-26.924,20.574) (-26.924,18.034) (-26.924,15.494) (-24.384,43.434) (-24.384,40.894) (-24.384,38.354) (-24.384,35.814) (-24.384,33.274) (-24.384,30.734) (-24.384,28.194) (-24.384,25.654) (-24.384,23.114) (-24.384,20.574) (-24.384,18.034) (-24.384,15.494) (-21.844,43.434) (-21.844,40.894) (-21.844,38.354) (-21.844,35.814) (-21.844,33.274) (-21.844,30.734) (-21.844,28.194) (-21.844,25.654) (-21.844,23.114) (-21.844,20.574) (-21.844,18.034) (-21.844,15.494) (-19.304,43.434) (-19.304,40.894) (-19.304,38.354) (-19.304,35.814) (-19.304,33.274) (-19.304,30.734) (-19.304,28.194) (-19.304,25.654) (-19.304,23.114) (-19.304,20.574) (-19.304,18.034) (-19.304,15.494) (-16.764,43.434) (-16.764,40.894) (-16.764,38.354) (-16.764,35.814) (-16.764,33.274) (-16.764,30.734) (-16.764,28.194) (-16.764,25.654) (-16.764,23.114) (-16.764,20.574) (-16.764,18.034) (-16.764,15.494) (-14.224,43.434) (-14.224,40.894) (-14.224,38.354) (-14.224,35.814) (-14.224,33.274) (-14.224,30.734) (-14.224,28.194) (-14.224,25.654) (-14.224,23.114) (-14.224,20.574) (-14.224,18.034) (-14.224,15.494) (-11.684,43.434) (-11.684,40.894) (-11.684,38.354) (-11.684,35.814) (-11.684,33.274) (-11.684,30.734) (-11.684,28.194) (-11.684,25.654) (-11.684,23.114) (-11.684,20.574) (-11.684,18.034) (-11.684,15.494) (-9.144,43.434) (-9.144,40.894) (-9.144,38.354) (-9.144,35.814) (-9.144,33.274) (-9.144,30.734) (-9.144,28.194) (-9.144,25.654) (-9.144,23.114) (-9.144,20.574) (-9.144,18.034) (-9.144,15.494) (-6.604,43.434) (-6.604,40.894) (-6.604,38.354) (-6.604,35.814) (-6.604,33.274) (-6.604,30.734) (-6.604,28.194) (-6.604,25.654) (-6.604,23.114) (-6.604,20.574) (-6.604,18.034) (-6.604,15.494) (-4.064,43.434) (-4.064,40.894) (-4.064,38.354) (-4.064,35.814) (-4.064,33.274) (-4.064,30.734) (-4.064,28.194) (-4.064,25.654) (-4.064,23.114) (-4.064,20.574) (-4.064,18.034) (-4.064,15.494) (-1.524,43.434) (-1.524,40.894) (-1.524,38.354) (-1.524,35.814) (-1.524,33.274) (-1.524,30.734) (-1.524,28.194) (-1.524,25.654) (-1.524,23.114) (-1.524,20.574) (-1.524,18.034) (-1.524,15.494) (1.016,43.434) (1.016,40.894) (1.016,38.354) (1.016,35.814) (1.016,33.274) (1.016,30.734) (1.016,28.194) (1.016,25.654) (1.016,23.114) (1.016,20.574) (1.016,18.034) (1.016,15.494) (3.556,43.434) (3.556,40.894) (3.556,38.354) (3.556,35.814) (3.556,33.274) (3.556,30.734) (3.556,28.194) (3.556,25.654) (3.556,23.114) (3.556,20.574) (3.556,18.034) (3.556,15.494) (6.096,43.434) (6.096,40.894) (6.096,38.354) (6.096,35.814) (6.096,33.274) (6.096,30.734) (6.096,28.194) (6.096,25.654) (6.096,23.114) (6.096,20.574) (6.096,18.034) (6.096,15.494) (8.636,43.434) (8.636,40.894) (8.636,38.354) (8.636,35.814) (8.636,33.274) (8.636,30.734) (8.636,28.194) (8.636,25.654) (8.636,23.114) (8.636,20.574) (8.636,18.034) (8.636,15.494)
Y-CSTCW_X
  rect 0.5x2.6 smd: 1(-1,0) 2(0,0) 3(1,0)
Y-XTAL-CFS308
  round 0.914 hole 0.508: 1(0,0) 2(0,-1.27)
  rect 9.525x3.81 smd: 3(5.842,-0.635)
  round 1.778 hole 1.016: 4(8.89,3.175) 5(8.89,-4.445)

## Nets
3V3_FX12P: C7.1 C10.1 C11.1 C12.1 C16.1 C18.1 C20.1 C21.1 R5.1 R6.1 R9.2 R14.1 R17.1 U3.8(VCC) U5.3(AVCC1) U5.7(AVCC2) U5.11(VCC1) U5.13(IFCLK) U5.17(VCC3) U5.27(VCC4) U5.32(VCC2) U5.43(VCC5) U5.55(VCC6)
GND: C2.2 C3.2 C4.2 C5.2 C6.2 C7.2 C8.2 C10.2 C11.2 C12.2 C16.2 C18.2 C19.2 C20.2 C21.2 D9.2(ANODE) D10.2(ANODE) D11.2(ANODE) D15.1(ANODE) D16.1(ANODE) J1.5(GND) J4.2(SHIELD) Q1.2(G) Q4.2(G) R1.2 R3.2 R10.2 R18.2 R22.1 TP1.1 U1.3(GND) U1.6(GND1) U1.7(GND2) U2.1(GND) U3.4(GND) U4.1(GND) U5.6(AGND1) U5.10(AGND2) U5.12(GND1) U5.14(RESERVED) U5.26(GND3) U5.28(GND4) U5.41(GND2) U5.53(GND5) U5.56(GND6) U5.57(CP) Y1.2(GND)
GND_EARTH: C8.1 J1.6(S1) J1.7(S2) J1.8(S3) J1.9(S4) R3.1
GND_EARTH1: C9.1 J2.6(S1) J2.7(S2) J2.8(S3) J2.9(S4) R4.1
GND_EARTH3: P7.10(S1) P7.11(S2)
V3.3: J10.1 P6.6 Q5.1(D) R9.1 R26.2 R71.1 R75.2 TP3.1
V3.3_EXT: P1.35 P2.35 Q4.1(D) R75.1
V5.0: C2.1 D1.1(CATHODE) D2.1(CATHODE) J10.3 P6.7 Q3.1(D) R15.1 R24.1 R72.2 R74.2 TP4.1 U4.3(VIN)
V5.0_EXT: P1.38 P2.38 Q1.1(D) R74.1
VBAT: C3.1 C6.1 L1.1 R1.1 TP2.1 U7.13(VBAT)
VBUS1: D2.2(ANODE) D8.2(ANODE) D9.1(CATHODE) J1.1(VBUS) R21.2
VBUS2: D1.2(ANODE) D7.2(ANODE) D14.1(CATHODE) J2.1(VBUS) R8.1
VCCA: C36.1 C37.1 J42.1 U7.63(VCCA)
VCCD: C35.1 C44.1 J41.1 U7.39(VCCD#39) U7.86(VCCD#86)
VDDA: C38.1 J6.1 J8.1 J30.1 J31.1 J38.2 P6.8 R23.2 R25.1 R30.2 R35.2 R39.2 U6.2(VIN) U6.3(EN) U7.65(VDDA)
VDDA_P: C13.1 C17.2 J33.1 J38.1 R12.1 R13.1 R23.1 U1.1(OUT)
VDDD: C1.1 C29.1 C33.1 C41.1 C42.1 J3.1 J5.1 J10.2 J12.1 J14.1 J29.1 J37.1 J38.3 J40.1 P9.7 R30.1 R31.1 R36.2 R47.2 R58.1 U7.37(VDDD#37) U7.88(VDDD#88)
VIN: C4.1 C5.1 D3.1(CATHODE) D4.1(CATHODE) D7.1(CATHODE) D8.1(CATHODE) P1.39 P2.39 U1.5(NSHDN) U1.8(IN) U2.3(VIN)
VSSA: C13.2 C24.2 C25.2 C26.2 C27.2 C28.2 C30.2 C31.2 C32.2 C36.2 C37.2 C38.2 C40.2 C45.2 C54.2 C55.2 J7.1 J27.1 J32.1 J35.1 P1.9 P1.19 P1.29 P6.1 R11.2 R55.1 R56.1 R57.1 U6.1(GND) U6.4(GND1) U6.7(GND2) U6.8(GND3) U7.64(VSSA) Y2.3 Y2.4 Y2.5
VSSB: C22.2 C23.2 R28.1 U7.10(VSSB)
VSSD: C1.2 C9.2 C14.2 C15.2 C29.2 C33.2 C34.2 C35.2 C39.2 C41.2 C42.2 C43.2 C44.2 C46.2 C47.2 C48.2 C49.2 C52.2 C53.2 D5.1(K) D12.2(ANODE) D13.2(ANODE) D14.2(ANODE) J2.5(GND) J3.3 J3.5 J3.7 J3.9 J26.1 J28.1 J34.1 J36.1 J40.3 J40.5 J40.7 J40.9 P2.9 P2.19 P2.29 P2.37 P2.40 P6.2 P7.5 P8.1(GND) P8.16(K) P9.8 R2.2 R4.2 R57.2 R59.2 R60.2 R61.2 R62.2 R67.1 R68.2 SW1.2A SW1.2B SW2.2A SW2.2B SW3.2A SW3.2B U7.14(VSSD#14) U7.38(VSSD#38) U7.66(VSSD#66) U7.87(VSSD#87) U8.15(GND)
/XRES: J3.10 SW1.1A SW1.1B TP5.1 TV1.1 U5.20(PB2/FD2) U7.15(XRES)
CGND1: P1.37 P1.40
CTS: P7.7 U8.8(RX2IN)
D+: D10.1(CATHODE) J1.2(DM) U5.9(DMINUS)
D-: D11.1(CATHODE) J1.3(DP) U5.8(DPLUS)
DM: D12.1(CATHODE) J2.2(DM) R32.1
DM_P: R32.2 U7.36(P15_7 DM)
DP: D13.1(CATHODE) J2.3(DP) R33.1
DP_P: R33.2 U7.35(P15_6 DP)
IND: R29.2 U7.11(IND)
LED1: LED1.2(A) P6.4
LED2: LED2.2(A) P6.3
NC2: U3.2(NC2)
P0[0]: P1.18 P4.8 U7.71(P0_0)
P0[1]: P1.17 P4.7 U7.72(P0_1)
P0[2]: J43.1 P1.16 P4.6 U7.73(P0_2)
P0[3]: P1.15 P4.5 R73.2 U7.74(P0_3)
P0[4]: J44.1 P1.14 P4.4 U7.76(P0_4)
P0[5]: P1.13 P4.3 U7.77(P0_5)
P0[6]: P1.12 P4.2 U7.78(P0_6)
P0[7]: P1.11 P4.1 U7.79(P0_7)
P1[2]: P2.6 U7.22(P1_2)
P1[5]: P2.3 U7.25(P1_5)
P1[6]: P2.2 U7.27(P1_6)
P1[7]: P2.1 U7.28(P1_7)
P2[0]: P2.18 R40.1 U7.95(P2_0)
P2[1]: P2.17 R41.1 U7.96(P2_1)
P2[2]: P2.16 R42.1 U7.97(P2_2)
P2[3]: J40.2 P2.15 R43.1 U7.98(P2_3)
P2[4]: J40.4 P2.14 R44.1 U7.99(P2_4)
P2[5]: J40.6 P2.13 R45.1 U7.1(P2_5)
P2[6]: J40.8 P2.12 R46.1 U7.2(P2_6)
P2[7]: J40.10 P2.11 U7.3(P2_7)
P3[0]: P1.8 P3.8 U7.44(P3_0)
P3[1]: P1.7 P3.7 U7.45(P3_1)
P3[2]: P1.6 P3.6 R37.2 U7.46(P3_2)
P3[3]: P1.5 P3.5 U7.47(P3_3)
P3[4]: P1.4 P3.4 U7.48(P3_4)
P3[5]: P1.3 P3.3 U7.49(P3_5)
P3[6]: P1.2 P3.2 U7.51(P3_6)
P3[7]: P1.1 P3.1 U7.52(P3_7)
P4[0]: P1.28 U7.69(P4_0)
P4[1]: P1.27 U7.70(P4_1)
P4[2]: P1.26 U7.80(P4_2)
P4[3]: P1.25 U7.81(P4_3)
P4[4]: P1.24 U7.82(P4_4)
P4[5]: P1.23 U7.83(P4_5)
P4[6]: P1.22 U7.84(P4_6)
P4[7]: P1.21 U7.85(P4_7)
P5[0]: P2.28 R49.1 U7.16(P5_0)
P5[1]: P2.27 R50.1 U7.17(P5_1)
P5[2]: P2.26 R51.1 U7.18(P5_2)
P5[3]: P2.25 R52.1 U7.19(P5_3)
P5[4]: P2.24 R53.1 U7.31(P5_4)
P5[5]: P2.23 R54.1 U7.32(P5_5)
P5[6]: P2.22 R48.1 U7.33(P5_6)
P5[7]: P2.21 U7.34(P5_7)
P6[0]: P9.5 U7.89(P6_0)
P6[1]: SW2.1A SW2.1B U7.90(P6_1)
P6[2]: LED3.2(A) U7.91(P6_2)
P6[3]: LED4.2(A) U7.92(P6_3)
P6[4]: C39.1 R38.2 U7.6(P6_4)
P6[5]: C45.1 P6.5 R55.2(WIPER) R56.2(WIPER) U7.7(P6_5)
P6[6]: P9.6 U7.8(P6_6)
P6[7]: R2.1 R8.2 U7.9(P6_7)
P12[0]: P1.34 P2.34 U7.53(SIO, I2C1_SCL P12_0)
P12[1]: P1.33 P2.33 U7.54(SIO, I2C1_SDA P12_1)
P12[2]: P1.32 P2.32 U7.67(SIO_P12_2)
P12[3]: P1.31 P2.31 U7.68(SIO_P12_3)
P12[4]: P9.1 U7.4(P12_4 I2C0_SCL, SIO)
P12[5]: P9.2 U7.5(P12_5 I2C0_SDA, SIO)
P12[6]: P9.3 U7.29(P12_6_SIO)
P12[7]: P9.4 U7.30(P12_7_SIO)
P15[4]: R38.1 U7.93(P15_4)
P15[5]: SW3.1A SW3.1B U7.94(P15_5)
RTS: P7.8 U8.7(TR2OUT)
RX: P7.3 U8.13(RX1IN)
SEL3V3: J11.1 R13.2
SENSE: J11.2 R11.1 R12.2 U1.2(SENSE)
SERIAL_CTS: P5.3 R66.2
SERIAL_RTS: P5.4 R65.2
SERIAL_RX: P5.1 R63.2
SERIAL_TX: P5.2 R64.2
SWDCK: J3.4 P2.7 U5.46(PD1/FD9) U7.21(P1_1)
SWDIO: J3.2 P2.8 U5.45(PD0/FD8) U7.20(P1_0)
SWO: J3.6 P2.5 U5.47(PD2/FD10) U7.23(P1_3)
TDI: J3.8 P2.4 U7.24(P1_4)
TX: P7.2 U8.14(TR1OUT)
VBOOST: R27.2 R28.2 U7.12(VBOOST)
VLCD: C53.1 P8.2(VCC) R67.3 R69.1 R70.2 R71.2 R72.1
VREF: C24.1 J39.1 R34.1 U6.6(VREF)
N14769642: C19.1 R14.2 U5.42(RESET#)
N14769962: R5.2 U3.5(SDA) U5.16(SDA)
N14769966: R6.2 U3.6(SCL) U5.15(SCL)
N14770156: U5.5(XTALIN) Y1.3(I)
N14770196: U5.4(XTALOUT) Y1.1(O)
N14770234: R21.1 R22.2 U5.52(PD7/FD15)
N14770340: TV2.1 U5.54(CLKOUT)
N14770674: J9.1 R17.2 U5.44(WAKEUP#)
N14773122: C43.1 J25.1 R47.1 U7.100(VDDIO2)
N14773130: C34.1 J18.1 R36.1 U7.26(VDDIO1)
N14788516: J20.1 P1.20
N14788618: J17.1 P1.30
N14788646: J13.1 P1.36
N14798830: J15.1 P2.10
N14799086: J21.1 P2.30
N14799114: J24.1 P2.36
N15034817: P8.4(RSA) R45.2
N15034825: P8.5(R/NW) R46.2
N15034859: P8.3(VO) R67.2(WIPER) R68.1 R69.2
N15034875: P8.15(A) R70.1
N15041079: C22.1 C23.1 D6.1(CATHODE) R25.2 R27.1 R31.2
N15041221: D6.2(ANODE) L1.2 R29.1
N16777310: BH2.1(POS1) BH2.2(POS2) BH2.3(POS3) D4.2(ANODE)
N16777347: C15.1 R26.1 U4.2(VOUT) U4.4(TAB)
N16777432: BH1.1(NEG1) BH1.2(NEG2) BH1.3(NEG3) J4.3(SWITCH)
N17003812: C17.1 U1.4(BYP)
N17283168: C25.1 U7.55(P15_2) Y2.1
N17296907: C27.1 U7.56(P15_3) Y2.2
N17311849: C31.1 U7.42(P15_0) Y3.2
N17314242: C30.1 U7.43(P15_1) Y3.1
N17731131: LED1.1(K) R62.1
N17732495: LED2.1(K) R61.1
N17733861: LED3.1(K) R60.1
N17738648: LED4.1(K) R59.1
N18045718: D5.2(A) R15.2
N18226314: C28.1 C32.1 R34.2 R37.1 R73.1
N18405708: C26.1 J16.1 R35.1 U7.50(VDDIO3)
N18424200: C40.1 J22.1 R39.1 U7.75(VDDIO0)
N18591463: C51.1 U8.4(C2+)
N18592363: C51.2 U8.5(C2-)
N18594841: C50.1 U8.1(C1+)
N18595747: C50.2 U8.3(C1-)
N18596656: C46.1 C47.1 C48.1 J37.2 R58.2 U8.16(VCC)
N18622832: C49.1 U8.2(V+)
N18625475: C52.1 U8.6(V-)
N18660336: R64.1 U8.11(TR1IN)
N18662209: R63.1 U8.12(RX1OUT)
N18664090: R65.1 U8.10(TR2IN)
N18665979: R66.1 U8.9(RX2OUT)
N19225287: J30.2 R55.3 R56.3
N19309695: P8.11(D4) R40.2
N19312684: P8.12(D5) R41.2
N19313685: P8.13(D6) R42.2
N19315692: P8.14(D7) R43.2
N19318568: P8.6(EN) R44.2
N19574244: J19.1 P2.20
N19665063: J23.1 P1.10
N19970100: C14.1 R24.2 U2.2(VOUT)
N20543118: D3.2(ANODE) J4.1(CENTER)
N21185654: CSS1.4 R52.2
N21185709: CSS1.1 R49.2
N21185711: CSS1.5 R53.2
N21185727: CSB2.1 R48.2
N21185729: CSB1.1 R54.2
N21185731: CSS1.3 R51.2
N21185741: CSS1.2 R50.2
N23820866: Q4.3(S) Q5.3(S) Q6.3(S) R16.1
N23820870: D16.2(CATHODE) Q6.2(G) R16.2
N23820874: Q5.2(G) Q6.1(D) R18.1
N23821019: Q1.3(S) Q2.3(S) Q3.3(S) R7.1
N23821032: D15.2(CATHODE) Q2.2(G) R7.2
N23821036: Q2.1(D) Q3.2(G) R10.1
N23832976: C54.1 J43.2
N23837085: C55.1 J44.2

Pads without a net: J1 4; J2 4; J11 3; P7 1 4 6 9; P8 7 8 9 10; U3 1 3 7; U5 1 2 18 19 21 22 23 24 25 29 30 31 33 34 35 36 37 38 39 40 48 49 50 51; U6 5; U7 40 41 57 58 59 60 61 62

## Via types
v1: diameter 1.016, hole 0.508, TOP to BOTTOM, 165 vias
v2: diameter 0.61, hole 0.305, TOP to BOTTOM, 295 vias
v3: diameter 0.457, hole 0.203, TOP to BOTTOM, 99 vias

## Routing (per net, layer and track width the routed paths; a pad name or vN(x,y) marks a point on that pad's centre or on a via; arc(x,y) is an arc through that point)
3V3_FX12P: length 56.5
  TOP w0.203: U5.17 85.43,139.86 85.2,140.09 84.44,140.09 83.69,140.84 82.41,140.84 v2(82.36,140.89) ; U5.7 87.89,135.01 88.39,134.5 89.03,134.5 89.3,134.77 89.3,137.31 v2(90.04,138.05) ; U5.43 77.03,131.25 76.2,130.43 v1(76.2,130.3) ; 79.15,140.61 80.06,140.61 80.43,140.24 U5.27 ; U5.13 v2(88.39,138.01) ; v2(89.92,132.33) 88.9,132.33 88.23,133.01 U5.3 ; v2(89.92,130.68) 89.66,130.43 86.11,130.43 85.94,130.6 U5.55 ; U5.11 88.49,137.01 89.03,137.54 89.03,138.56 v2(89.66,139.19) ; v1(77.85,135.38) 77.98,135.51 77.98,136.53 78.46,137 U5.32
  TOP w0.305: C7.1 77.97,139.48 79.1,140.61 79.15,140.61
  TOP w0.635: v2(89.92,132.33) 90.04,132.46 C16.1 ; v2(94.49,144.02) R5.1 94.6,143.26 95.88,143.26 96.14,143.51 U3.8 ; v2(89.66,139.19) 89.97,139.5 C10.1 ; 73.53,129.79 75.06,129.79 75.56,130.3 v1(76.2,130.3) ; 73.53,129.79 73.02,129.29 C20.1 ; 73.53,129.79 72.91,130.42 R14.1 ; v2(82.36,140.89) C21.1 ; C18.1 90.42,131.19 v2(89.92,130.68) ; C11.1 v2(90.04,138.05) ; v1(78.11,141.38) 78.11,141.33 77.14,140.36 C7.1 ; v1(77.85,135.38) C12.1 ; v2(93.34,138.3) 93.36,138.29 R6.1 ; R17.1 v2(76.58,126.75)
  TOP w0.762: R9.2 v1(77.72,133.6)
GND: length 142.8
  TOP w0.203: 85.34,129.91 84.94,130.32 U5.53 ; 84.94,133.5 v2(85.72,132.72) ; 99.54,140.69 95.63,140.69 95.33,140.39 95.33,137.39 94.82,136.88 94.82,136.07 93.88,135.13 v1(93.34,135.13) ; v2(85.72,135.25) v2(83.19,135.25)
  TOP w0.254: U5.12 85.44,137.51 84.44,136.51 ; v2(83.19,135.25) 80.43,132.5 U5.41 ; v2(83.19,135.25) 84.44,136.51 ; v2(83.19,135.25) 83.93,134.51 U5.6 ; v2(83.19,135.25) 80.93,137.51 U5.26 ; 84.44,136.51 U5.10 ; v2(88.39,138.94) 87.96,138.51 U5.14 ; U5.28 79.93,139.9 79.72,140.12 79.34,140.12 78.28,139.06 78.28,138.71 77.7,138.13 77.2,138.13 C7.2 ; Y1.2 91.44,135.13 ; U5.53 84.94,133.5
  TOP w0.305: R22.1 86.47,129.22 86.23,129.46 85.79,129.46 85.34,129.91 ; U5.56 v2(88.27,131.25)
  TOP w0.381: 91.44,135.13 v1(93.34,135.13)
  TOP w0.508: C7.2 v1(77.14,136.93) ; v2(84.51,141.58) 84.51,142.34 85.34,143.18 85.34,143.76 85.64,144.06 J1.5 ; R3.2 v2(80.9,146.56) ; C8.2 80.9,149.85 ; U3.4 v2(99.95,140.97)
  TOP w0.584: J4.2 13.21,145.76 ; J4.2 15.05,143.92 ; J4.2 13.21,142.08 ; J4.2 11.37,143.92
  TOP w0.635: C4.2 v1(30.48,145.41) ; C18.2 92.84,131.19 v1(93.34,130.68) ; C11.2 92.09,137.78 v2(92.58,137.29) ; v1(93.34,132.84) 92.96,132.46 C16.2 ; U1.7 24.13,141.6 24.77,140.97 ; C12.2 v1(73.53,135.38) ; C20.2 72.39,126.97 72.9,126.47 v1(72.9,126.37) ; C19.2 71.12,126.75 v1(71.53,126.34) ; D11.2 v2(84.51,141.58) C21.2 ; C5.2 v1(33.02,146.18) ; D9.2 v2(95.76,147.94) ; 80.9,149.85 v2(80.9,150.75) ; C10.2 v2(93.09,139.5)
  TOP w0.762: Q4.2 v1(18.8,119.65) ; Q1.2 v1(7.04,130.38) ; v2(93.09,141.58) D10.2
  TOP w1.016: U2.1 v1(36.41,142.11) ; R1.2 52.26,142.57 C3.2 51.64,143.8 C6.2 51.64,147.12 TP1.1 ; C2.2 52.48,130.43 53.42,129.49 v1(53.42,129.18) ; R10.2 10.03,137.06 v1(9.3,137.79) ; R18.2 27.88,125.92 27.18,126.62 D16.1 25.65,127 25.53,127.13 v1(25.46,127.13) ; D15.1 v1(12.83,127.63)
  TOP w1.27: v1(49.15,141.17) 49.61,140.72 U4.1
  L03_GND w0.584: J4.2 13.21,145.76 ; J4.2 15.05,143.92 ; J4.2 11.37,143.92 ; J4.2 13.21,142.08 ; TP1.1 48.89,151.19 ; TP1.1 50.23,149.86 ; TP1.1 48.89,148.53 ; TP1.1 47.56,149.86
  BOTTOM w1.016: v1(53.42,129.18) 49.15,133.45 v1(49.15,141.17)
  vias: v1(31.95,137.44) v2(6.48,149.1) v2(6.48,147.83) v2(6.48,146.43) v2(6.48,145.16) v2(6.48,143.64) v2(11.18,148.72) v2(11.18,147.45) v2(12.83,140.59) v2(13.08,148.72) v2(13.08,147.45) v2(14.61,148.72) v2(14.61,147.45) v2(14.61,141.86) v2(14.61,140.59) v2(16.51,148.72) v2(16.51,147.45) v2(16.51,146.05) v2(16.51,144.78) v2(16.51,143.26) v2(16.51,141.86) v2(16.51,140.59) v2(18.41,146.05) v2(18.41,144.78) v2(20.32,146.05) v2(20.32,144.78) v2(22.23,146.05) v2(22.23,144.78) v2(24.13,146.05) v2(24.13,144.78) v2(25.4,139.95) v2(25.4,135.76) v2(26.04,146.05) v2(26.04,144.78) v2(27.94,146.05) v2(27.94,144.78) v2(80.64,135.89) v2(80.64,133.98) v2(81.91,132.72) v2(82.55,137.16) v2(83.82,137.16) v2(83.82,132.72)
GND_EARTH: length 25.3
  TOP w0.508: C8.1 81.04,148.59 82.26,148.59 J1.8
  TOP w0.762: R3.1 83.19,144.26 J1.9
  TOP w1.016: J1.9 J1.8 J1.6 J1.7
GND_EARTH1: length 25.7
  TOP w0.508: J2.9 57.78,141.72 R4.1 ; C9.1 66.8,144.02 J2.7
  TOP w1.016: J2.9 J2.8 J2.6 J2.7
GND_EARTH3: length 31.6
  L03_GND w1.016: P7.10 6.16,13.14 4.57,14.73 4.57,37.21 5.46,38.1 8.6,38.1 P7.11
V3.3: length 217.5
  TOP w0.635: R9.1 73.79,133.6 73.15,134.24 v1(72.52,134.24)
  TOP w0.762: Q5.1 25.15,123.06 24.77,123.44 R75.2
  TOP w1.016: v1(14.99,43.31) v1(2.41,43.31) ; R26.2 38.25,126.05 38.32,126.11 J10.1 ; v1(5.59,5.4) 6.24,5.4 7.18,4.46 R71.1 ; R75.2 24.38,123.51 v1(24.38,125.19)
  L02_PWR w1.016: 37.27,126.11 J10.1 38.61,127.44 ; 20.96,21.59 19.69,20.32 19.69,14.73 10.35,5.4 v1(5.59,5.4) ; 20.96,21.59 19.69,22.86 19.69,26.54 14.99,31.24 v1(14.99,43.31) ; 20.96,21.59 32.89,21.59 40.64,29.34 55.12,29.34 58.29,32.51 P6.6 ; 2.03,144.59 TP3.1 3.37,143.26 ; 2.92,115.95 2.16,115.95 1.78,115.57 1.78,68.33 4.19,65.91 4.19,58.29 1.02,55.12 1.02,44.7 v1(2.41,43.31) ; v1(31.37,128.52) 31.37,126.17 30.38,125.19 v1(24.38,125.19)
  BOTTOM w0.762: v1(31.37,128.52) 32.26,128.52 33.66,127.13 37.46,127.13 38.48,126.11 J10.1
  vias: v1(62.36,148.21) v2(98.3,136.53)
V3.3_EXT: length 310.3
  TOP w0.762: Q4.1 21.59,123.06 21.97,123.44 R75.1
  TOP w1.016: Q4.1 20.49,121.65 20.47,121.67 14.43,121.67 v1(12.61,123.48) ; v1(3.17,113.79) 3.17,116.4 4.25,117.47 P1.35
  L02_PWR w1.016: P1.35 4.06,119.27 4.06,123.44 4.96,124.34 11.75,124.34 v1(12.61,123.48) ; v1(3.17,113.79) 3.17,69.09 5.71,66.55 5.71,52.83 4.19,51.31 4.19,18.54 5.08,17.65 11.43,17.65 12.7,16.38 v1(12.7,9.78) ; v1(63.31,10.99) 70.23,4.06 94.36,4.06 98.68,8.38 98.68,76.44 P2.35
  BOTTOM w1.016: v1(12.7,9.78) 26.42,9.78 27.62,10.99 v1(63.31,10.99)
V5.0: length 149.7
  TOP w0.178: v3(84.07,123.06) 75.69,114.68 75.69,110.96 72.42,107.7 61.5,107.7
  TOP w0.635: v1(10.92,3.94) 10.92,2.6 R72.2
  TOP w0.762: Q3.1 6.11,134.51 5.71,134.11 4.38,134.11 R74.2
  TOP w1.016: R24.1 v1(41.02,121.48) ; v1(62.48,129.41) D1.1 63.93,130.99 v1(64.26,131.32) ; TP4.1 2.03,134.62 2.32,134.34 2.48,134.18 R74.2 ; v1(92.08,129.03) 92.28,128.83 D2.1
  TOP w1.27: R15.1 55.08,131.76 54.64,132.21 53.39,132.21 v1(53.16,131.98) 52.93,131.98 51,133.91 49.66,133.91 49.63,133.93 ; J10.3 44.96,126.11 47.24,128.4 48.84,128.4 49.73,129.29 49.73,130.33 C2.1 49.63,133.93 ; 49.63,133.93 U4.3
  L02_PWR w1.016: 52.32,24.77 55.37,24.77 60.83,30.23 P6.7
  BOTTOM w1.016: v1(53.16,131.98) 53.16,131.75 54.99,129.92 54.99,123.57 52.9,121.48 v1(41.02,121.48) 38.48,121.48 37.58,122.38 31.67,122.38 30.1,123.95 23.62,123.95 22.61,124.97 19.18,124.97 18.03,126.11 18.03,129.29 17.14,130.18 11.94,130.18 7.87,134.24 5.46,134.24 4.06,135.64 TP4.1
  vias: v3(87.63,123.44)
V5.0_EXT: length 305.6
  TOP w0.762: v1(4.32,130.68) 4.45,130.56 5.59,130.56 6.11,131.08 Q1.1
  TOP w1.016: R74.1 v1(4.32,130.68)
  L02_PWR w1.016: 11.86,79.49 11.86,67.36 9.65,65.15 9.65,52.7 8.64,51.69 7.11,51.69 6.22,50.8 6.22,45.47 7.75,43.94 11.56,43.94 13.46,42.04 13.46,29.84 14.61,28.7 v1(14.61,11.94) ; 11.86,79.49 11.87,79.5 11.87,80.39 ; 11.86,79.49 11.86,80.38 11.87,80.39 ; P2.38 91.44,76.84 90.55,75.95 90.55,73.41 91.82,72.14 96.27,72.14 97.16,71.25 97.16,8.89 93.73,5.46 75.18,5.46 72.26,8.38 68.83,8.38 64.39,12.83 v1(63.5,12.83) ; 11.87,80.39 11.87,84.64 12.83,85.6 12.83,100.33 10.54,102.62 10.54,119.25 9.78,120.01 P1.38
  BOTTOM w0.762: v1(4.32,130.68) 4.7,130.3 4.7,128.78 3.68,127.76 3.68,125.73 4.57,124.84 9.78,124.84 10.42,124.2 10.42,122.04 P1.38
  BOTTOM w1.016: v1(63.5,12.83) 25.91,12.83 25.02,11.94 v1(14.61,11.94)
VBAT: length 84
  TOP w0.254: U7.13 59.31,92.96 60.2,92.07 61.09,92.07
  TOP w0.762: v1(64.9,92.96) 64.01,92.07 61.09,92.07
  TOP w1.016: TP2.1 55.04,147.52 C6.1 55.04,144.06 C3.1 54.17,142.57 R1.1 56.26,141.1 57.94,139.42 57.94,128.75 60.45,126.24 66.55,126.24 69.22,123.57 v1(69.22,122.3) 69.22,120.63 L1.1
  BOTTOM w1.016: v1(69.22,122.3) 69.22,122.17 69.72,121.67 69.72,94.49 67.31,92.07 65.79,92.07 v1(64.9,92.96)
VBUS1: length 6.8
  TOP w0.635: R21.2 87.55,126.75 D2.2
  TOP w1.016: D9.1 v1(94.61,145.29) ; v1(83.06,129.16) 83.26,128.96 D8.2 ; v1(88.52,129.16) 88.32,128.96 D2.2
  vias: v1(90.17,144.02)
VBUS2: length 7
  TOP w0.508: v1(63.83,141.6) J2.1
  TOP w0.635: D14.1 v1(63.83,141.6)
  TOP w1.016: v1(62.36,137.03) 61.91,136.59 R8.1
  vias: v1(64.26,137.03) v1(66.17,137.03)
VCCA: length 12.6
  TOP w0.203: U7.63 41.21,92.96 40.42,93.76 40.42,93.97
  TOP w0.508: 40.42,93.97 40,94.39 40,96.77 39.12,97.66 37.21,97.66 36.94,97.4 C36.1 36.84,96.62 C37.1
  TOP w0.762: C36.1 35.23,96.72 J42.1
VCCD: length 40.7
  TOP w0.254: v1(48.01,87.12) 48.73,86.4 48.74,86.4 49.04,86.1 U7.86 ; 49.28,98.3 49.28,98.55 49.53,98.81 49.53,99.53 49.54,99.53 U7.39 49.54,101.83 C35.1
  TOP w0.635: v1(48.51,76.71) 47.88,77.34 C44.1 ; 49.28,98.3 49.28,96.9 51.82,94.36 51.82,92.71 49.78,90.68 46.35,90.68 45.47,89.79 45.47,88.14 46.48,87.12 v1(48.01,87.12)
  TOP w1.016: v1(48.51,76.71) 49.66,76.71 J41.1
  BOTTOM w0.635: v1(48.51,76.71) 48.51,78.49 48.01,78.99 v1(48.01,87.12)
VDDA: length 184
  TOP w0.203: v1(35.79,94.11) C38.1 36.94,93.74 37.34,93.34 39.4,93.34 40.78,91.96 40.89,91.96 U7.65
  TOP w0.508: v1(32.38,123.82) 36.83,123.82 37.85,122.81 37.85,120.65 38.23,120.27 49.91,120.27 52.2,122.56 R25.1
  TOP w0.635: R39.2 v1(36.72,86.61) ; U6.2 22.35,112.27 21.84,112.78 v2(20.83,112.78) ; R35.2 v2(36.59,105.42) ; U6.3 22.1,111 21.59,111.51 v2(20.83,111.51)
  TOP w1.016: J38.2 33.85,117.41 R30.2
  L02_PWR w1.016: J31.1 14.22,55.88 13.59,55.24 13.59,51.69 12.57,50.67 10.79,50.67 9.65,49.53 J30.1 11.18,45.47 12.57,45.47 13.08,44.96 16.38,44.96 17.78,43.56 17.78,31.5 20.62,28.65 25.65,28.65 25.68,28.63 26.9,28.63 26.92,28.65 37.67,28.65 44.32,35.31 61.21,35.31 P6.8 ; 33.91,118.68 J38.2 33.91,116.01 ; J8.1 29.21,129.6 ; J8.1 29.21,126.94 ; J8.1 27.88,128.27
  BOTTOM w0.635: J6.1 6.73,138.18 10.03,134.87 10.03,133.98 12.45,131.57 17.4,131.57 19.18,129.79 19.18,127.48 20.45,126.21 24.81,126.21 26.01,125.02 31.19,125.02 v1(32.38,123.82)
  BOTTOM w1.016: v1(8,65.91) 15.11,65.91 v1(15.24,65.79)
  vias: v2(28.45,135.38)
VDDA_P: length 34.5
  TOP w0.635: 20.83,134.24 21.46,134.87 v1(22.1,134.87)
  TOP w0.762: C17.2 v2(29.2,131.43) ; v2(25.78,129.03) 25.72,129.1 24.51,129.1 ; U1.1 v2(22.86,135.89)
  TOP w1.016: J38.1 31.94,117.92 R23.1 ; R13.1 26.67,134.11 v2(26.42,134.37) ; R12.1 25.15,130.43 24.51,129.79 24.51,128.65 23.5,127.64 23.39,127.64 23.38,127.63 J33.1
  L02_PWR w1.016: J38.1 31.37,119.38 33.66,121.67 33.66,129.2 31.41,131.44 31.24,131.44 31.23,131.43 v2(29.2,131.43)
VDDD: length 248.5
  TOP w0.254: 50.42,83.57 50.04,83.95 U7.88 50.04,86.49 v1(48.01,88.52) ; U7.37 50.54,99.57 50.8,99.31
  TOP w0.381: C41.1 51.82,81.8 51.82,82.55 50.8,83.57 50.42,83.57
  TOP w0.508: J3.1 71.63,140.89 72.52,140 C1.1
  TOP w0.635: v2(52.82,106.79) 52.57,107.05 C29.1 ; v1(24.26,30.85) 23.06,30.85 R58.1 ; R36.2 v1(61.09,103.75) ; J40.1 v1(99.82,136.53) ; v1(71.63,115.32) 71.75,115.19 R31.1 ; R30.1 36.83,120.14 v1(37.21,119.76) ; C1.1 v1(70.99,138.82) ; C42.1 51.83,80.24 C41.1 ; R47.2 v1(57.66,77.22)
  TOP w0.762: C33.1 v2(48.88,104.47) ; 50.8,99.31 51.05,99.05 v1(51.05,98.68)
  TOP w1.016: R30.1 35.75,118.05 J38.3
  L02_PWR w0.635: v1(61.09,103.75) 61.09,111.89 ; v1(51.05,98.68) 52.32,98.68
  L02_PWR w1.016: 65.53,69.47 65.53,49.28 68.96,45.85 65.53,42.42 65.53,26.16 J14.1 ; 17.08,50.8 J29.1 19.75,50.8 ; 36.45,116.01 J38.3 ; J38.3 36.45,118.68 ; J38.3 37.78,117.35 ; J10.2 41.15,123.32 ; 36.45,112.89 J12.1 ; J12.1 36.45,115.56 ; J12.1 37.78,114.22 ; 24.96,32.64 J37.1 ; J37.1 26.29,33.97 ; J37.1 27.62,32.64 ; v2(52.82,106.79) 52.07,106.04 52.07,101.47 51.05,100.46 v1(51.05,98.68) 49.53,98.68 49.02,99.19 49.02,103.62 C33.1 v2(48.88,104.47)
  BOTTOM w0.635: J10.2 41.15,127.25 40.12,128.28 34.81,128.28 31.39,131.7 31.39,133.48 31.56,133.64 31.56,134.33 31.39,134.49 31.39,135.99 30.48,136.91 20.7,136.91 19.18,135.38 19.18,133.73 18.16,132.72 16.26,132.72 15.24,133.73 15.24,135.51 14.73,136.02 11.94,136.02 10.92,137.03 10.92,138.18 9.97,139.13 5.78,139.13 4.19,140.72 J5.1
  BOTTOM w1.016: v1(59.31,129.54) 59.31,130.73 61.29,132.72 66.17,132.72 69.21,135.76 69.21,137.92 70.12,138.82 v1(70.99,138.82) 70.99,143.89 76.47,149.36 92.82,149.36 97.66,144.53 97.66,139.7 99.82,137.54 v1(99.82,136.53)
  vias: v2(50.67,69.85) v2(58.29,69.85)
VIN: length 301.9
  TOP w1.016: 5.85,124.02 5.85,122.56 4.39,122.56 ; v1(80.77,126.11) 79.38,127.51 D8.1
  TOP w1.143: P2.39 v1(95.75,69.72)
  BOTTOM w1.27: v1(95.75,69.72) 97.09,69.72 99.95,66.87 99.95,8.13 93.6,1.78 8.51,1.78 7.49,2.79 7.49,7.11 1.27,13.33 1.27,39.62 6.35,44.7 6.35,50.8 7.24,51.69 8.89,51.69 9.52,52.32 9.52,54.48 4.32,59.69 4.32,65.41 1.83,67.89 1.83,120.45 3.94,122.56 5.85,122.56
  vias: v1(20.96,142.37) v1(20.96,140.59) v1(27.3,140.72) v1(28.07,142.24) v1(68.07,131.32) v1(68.07,129.79) v1(71.12,132.97) v1(71.12,130.18)
VSSA: length 104.5
  TOP w0.178: 43.69,99.19 43.69,99.31
  TOP w0.203: 33.66,92.58 34.8,91.44 38.35,91.44 ; 32.77,95.25 32.36,95.66 30.82,95.66 30.72,95.76 30.48,95.76
  TOP w0.254: P1.29 7.12,108.59 10.29,108.59 ; v3(10.29,83.19) 7.11,83.19 5.85,84.44 5.85,84.46 ; P1.19 5.85,97.14 7.11,95.88 v2(11.68,95.88) ; 40.51,92.96 41.01,92.46 U7.64 43.7,92.46 44.32,93.09 v1(44.32,93.73)
  TOP w0.305: 43.69,99.31 42.93,100.08 ; 43.81,86.74 42.67,85.6
  TOP w0.381: 40.51,92.96 39.37,94.11 C38.2
  TOP w0.635: C25.2 40,109.73 39.12,110.62 v1(38.73,110.62) ; C27.2 v1(41.15,106.55) ; C36.2 38.24,95.53 C37.2 38.34,94.21 C38.2 ; v1(20.45,129.54) 20.83,129.92 C13.2 ; R11.2 23.24,130.18 v1(22.61,129.54) ; C26.2 v2(35.69,108.2)
  TOP w1.016: 1.65,50.42 1.58,50.35 1.58,46.68 J35.1
  L03_GND w0.254: 5.85,84.46 5.85,84.44 7.11,83.19 v3(10.29,83.19) ; P1.29 5.85,109.84 7.11,108.59 10.29,108.59 ; P1.19 5.85,97.14 7.11,95.88 v2(11.68,95.88)
  BOTTOM w0.254: P1.19 5.85,97.14 7.11,95.88 v2(11.68,95.88) ; P1.29 5.85,109.84 7.11,108.59 10.03,108.59 ; 5.85,84.46 5.85,84.44 7.11,83.19 v3(10.29,83.19)
  BOTTOM w1.016: 39.62,117.09 41.08,117.09 ; 39.62,117.09 39.62,115.63 ; 39.62,117.09 38.16,117.09 ; 39.62,117.09 39.62,118.55 ; R56.1 5.33,53.5 ; R56.1 2.41,53.5 ; R56.1 3.87,52.04 ; R56.1 3.87,54.96 ; J7.1 2.03,130.94 ; J7.1 2.03,128.14 ; J7.1 3.43,129.54 ; Y2.5 48.7,117.09 ; Y2.5 47.24,115.63 ; Y2.5 47.24,118.55 ; Y2.5 45.78,117.09
  vias: v1(43.43,117.07) v1(43.43,114.53) v1(43.43,111.99) v2(2.03,124.59) v2(2.03,123.06) v2(5.21,50.16) v2(7.49,50.16) v2(11.18,92.71) v2(11.68,93.98) v2(12.57,106.04) v2(12.57,102.23) v2(13.97,120.27) v2(13.97,118.36) v2(21.72,92.07) v2(25.91,90.81) v2(29.08,91.57) v2(30.73,133.98) v2(31.24,130.18) v2(31.37,102.87) v2(31.5,98.3) v2(38.1,89.79) v2(39.62,86.11) v2(44.32,87.63) v2(45.71,106.81) v2(49.8,106.81) v2(54.23,73.79) v2(59.44,73.66) v3(4.95,70.74) v3(10.03,77.47) v3(10.03,70.74) v3(10.16,78.74) v3(10.16,74.42) v3(10.29,88.9) v3(10.41,80.01) v3(10.54,81.28) v3(10.67,75.95) v3(11.18,86.36) v3(12.83,83.19) v3(13.21,81.28) v3(13.46,75.95) v3(13.46,70.74) v3(13.97,72.39) v3(14.35,90.22) v3(14.48,81.28) v3(14.48,80.14) v3(14.61,89.05) v3(15.11,70.74) v3(15.75,80.14) v3(15.88,72.39) v3(16,77.47) v3(16,75.95) v3(17.27,86.87) v3(17.4,77.47) v3(17.65,70.74) v3(17.78,72.39) v3(18.29,85.6) v3(18.54,75.95) v3(19.43,86.87) v3(20.07,86.11) v3(20.19,70.74) v3(20.32,72.39) v3(22.23,84.07) v3(22.86,77.09) v3(22.86,75.57) v3(24.38,75.56) v3(25.65,74.68) v3(26.54,73.79) v3(35.31,84.33) v3(35.69,86.49) v3(43.05,101.85)
